# Altium PCB Tx_pcb.PcbDoc
Units mm, origin at the board's own origin, x right, y up, seen from the top; angles counter-clockwise.
Board outline 78 x 78 mm, 4 copper layers (Top Layer, MidLayer1, MidLayer2, Bottom Layer); 139 components, 86 nets, 410 pads, 146 vias.
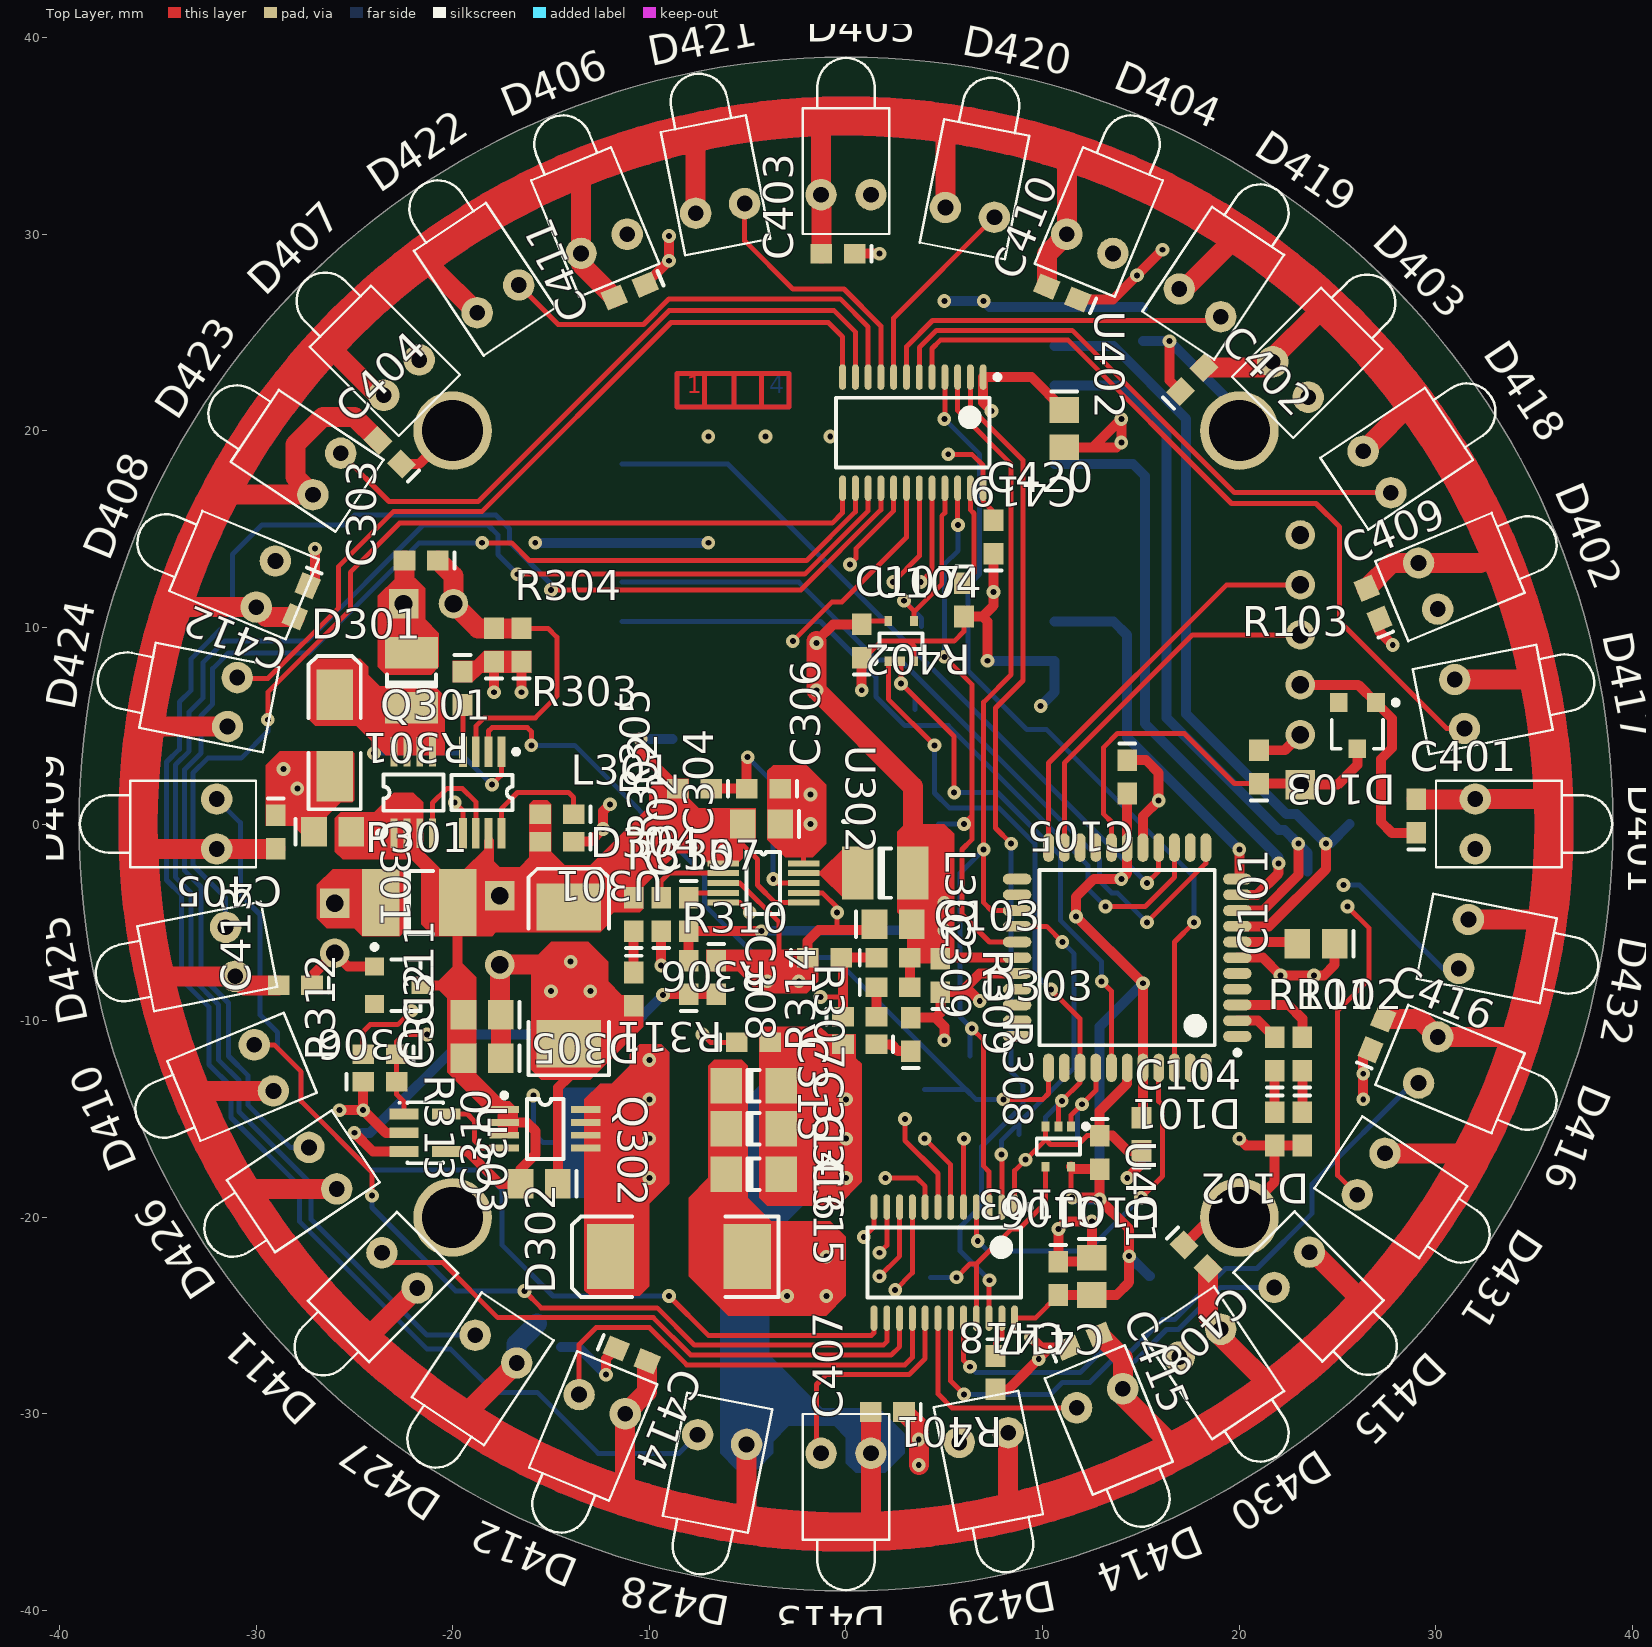
[diagram p0: Top Layer view]
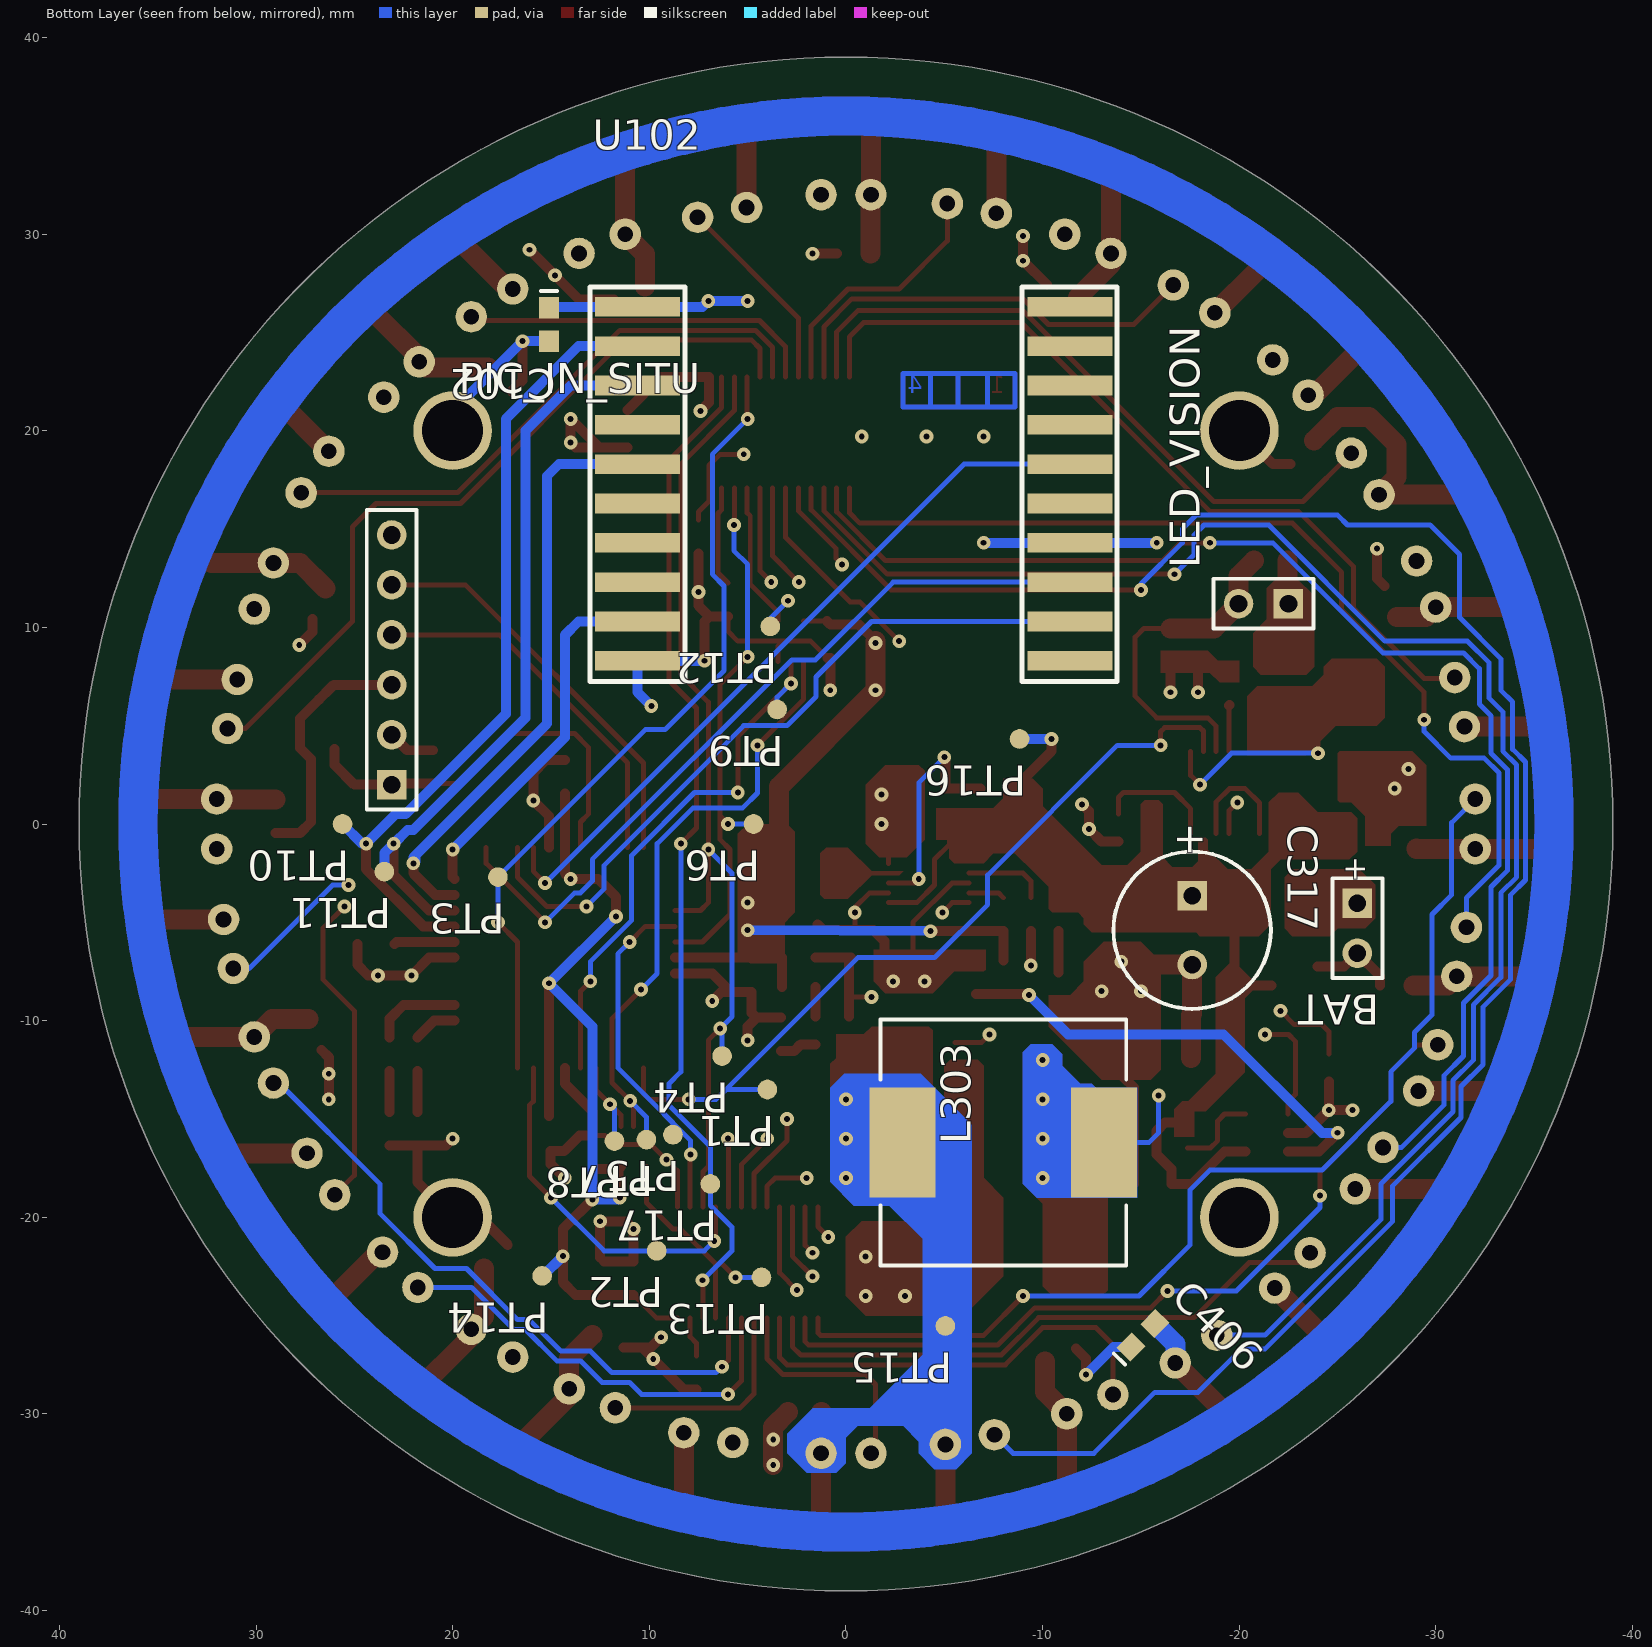
[diagram p1: Bottom Layer view, seen from below]
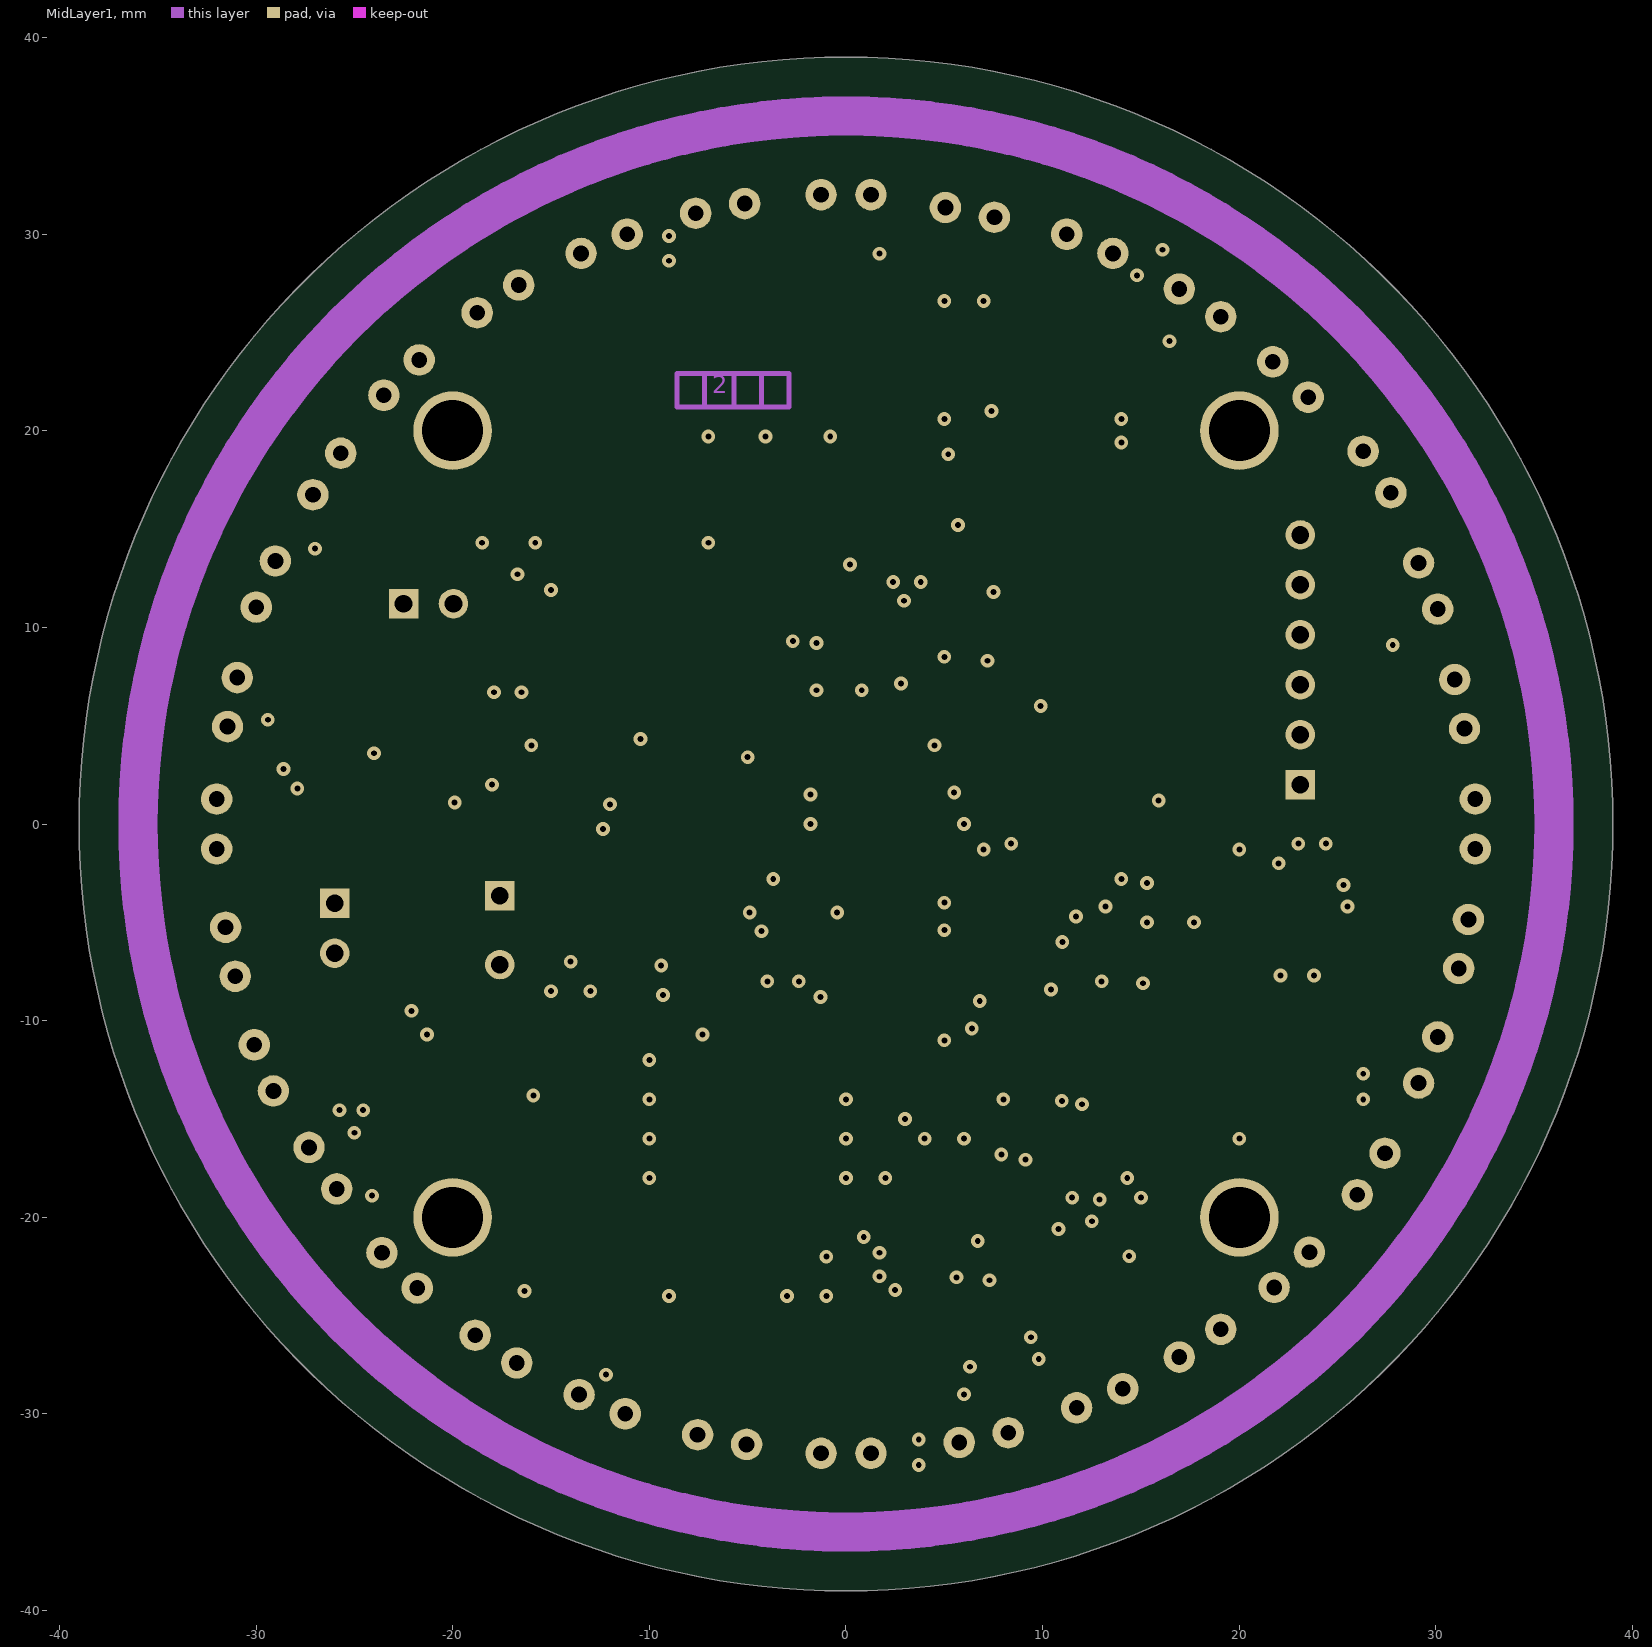
[diagram p2: MidLayer1]
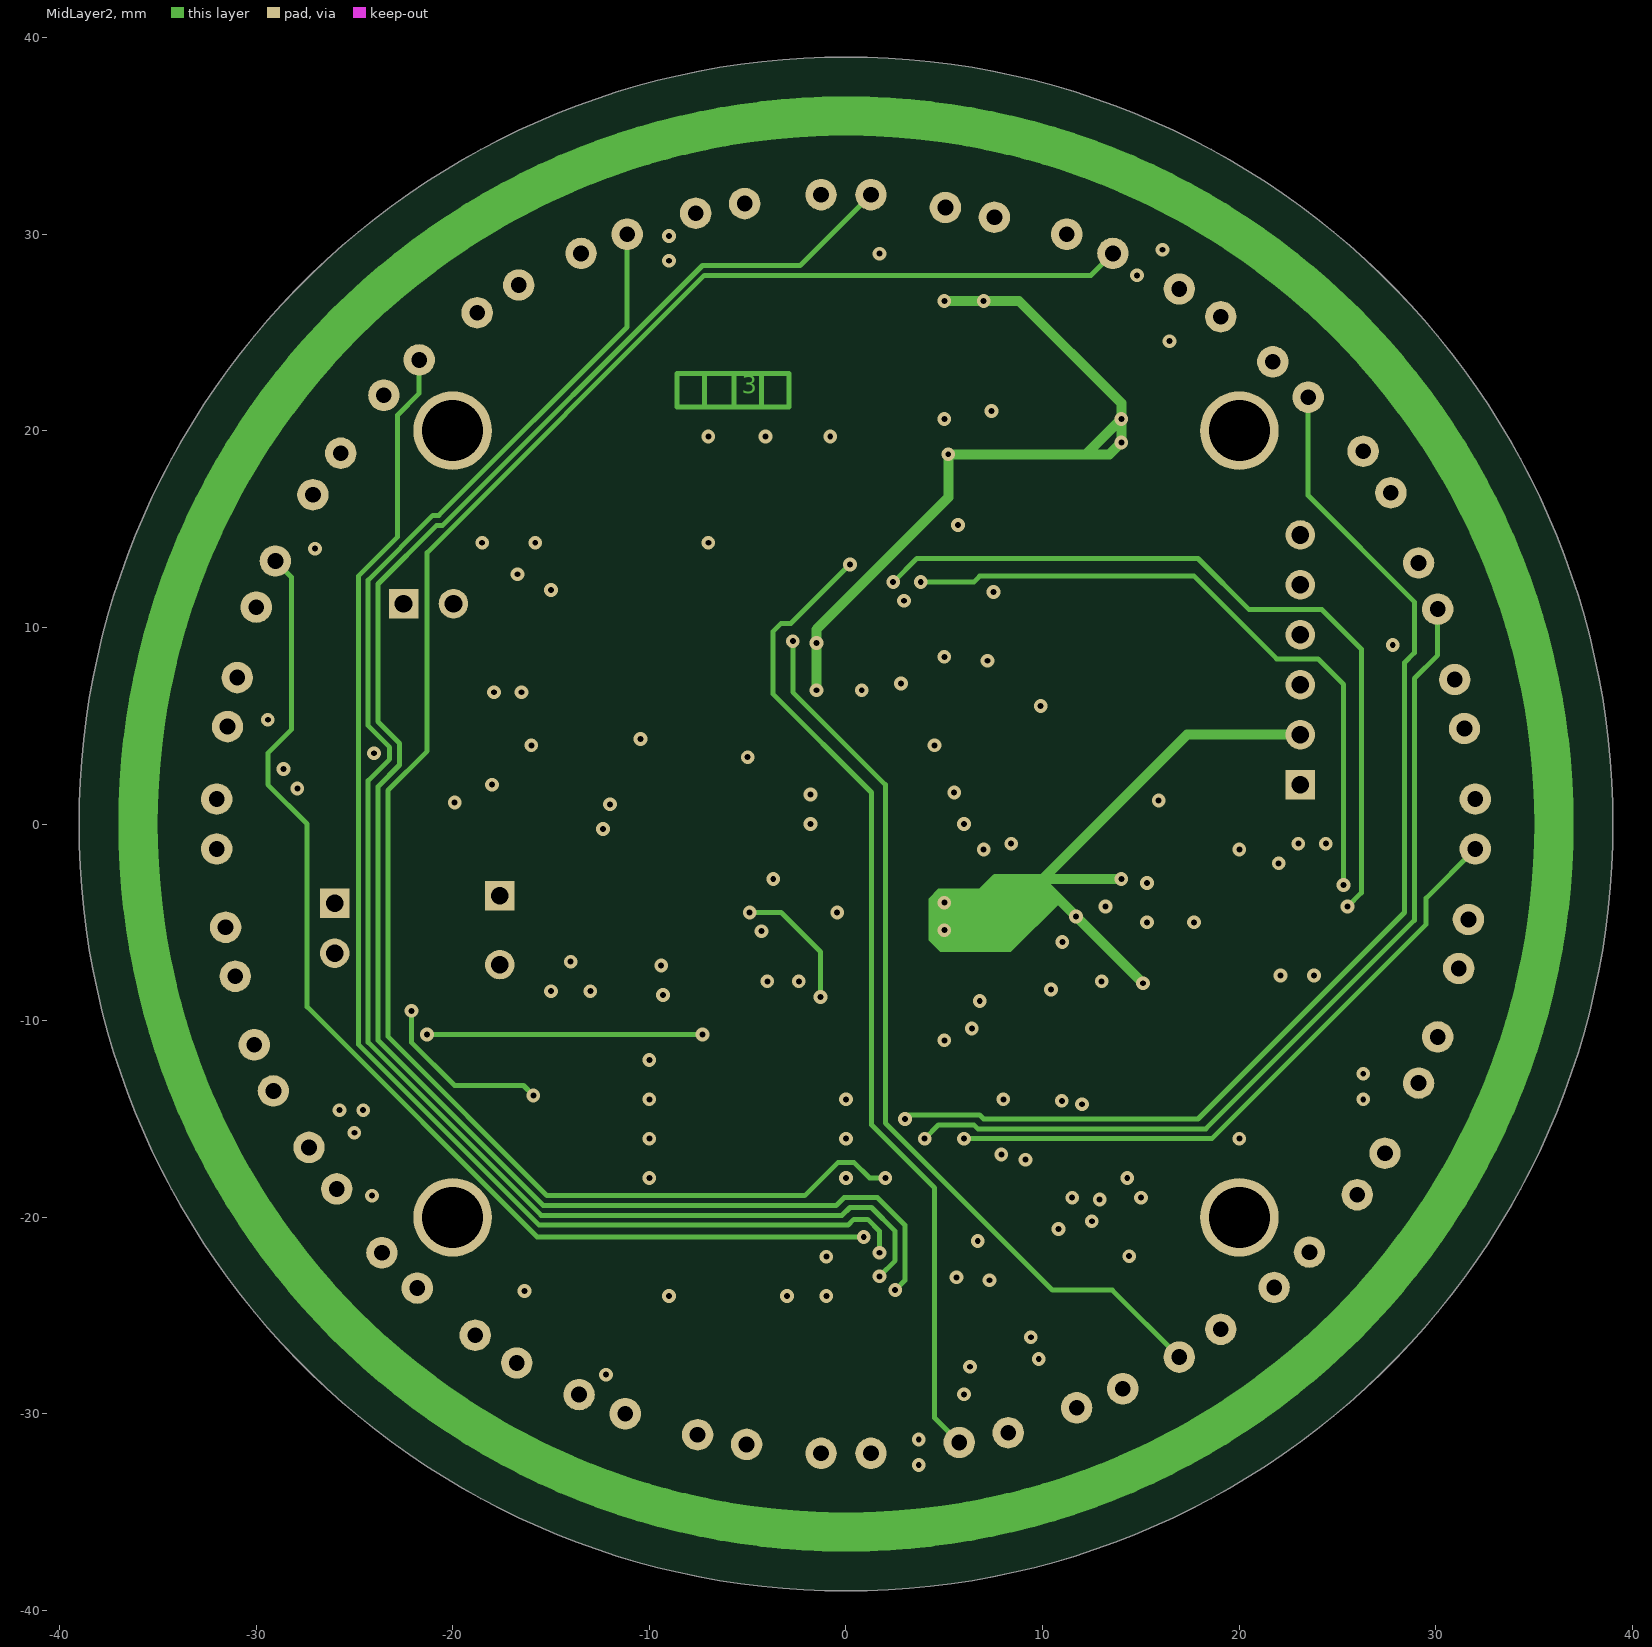
[diagram p3: MidLayer2]

## Layer stack, top to bottom
Top Layer: signal copper 0.0356
Dielectric: core 0.32, FR-4, Dk 4.8
MidLayer1: signal copper 0.0356
Dielectric: prepreg 0.32, FR-4, Dk 4.8
MidLayer2: signal copper 0.0356
Dielectric: core 0.32, FR-4, Dk 4.8
Bottom Layer: signal copper 0.0356

## Board outline
-39,0 ccw(c0,0) 0,-39 ccw(c0,0) 39,0 ccw(c0,0) 0,39 ccw(c0,0)

## Design rules (kind name [scope] priority, off if disabled: settings)
Clearance [All] p1: gap=0.15
ComponentClearance [All] p1: gap=0.15 collisioncheckmode=3 verticalgap=0.254 showdistances=FALSE
HoleSize [All] p1: absolutevalues=TRUE maxlimit=5 minlimit=0.3 maxpercent=80.000 minpercent=20.000
PolygonConnect [All] p1: connectstyle=Relief reliefconductorwidth=0.254 reliefentries=4 polygonreliefangle="90 Angle"
RoomDefinition Tx_leds [InComponentClass('Tx_leds')] p1: confinementstyle=ConfineIn formatcopy=TRUE lockcomponents=FALSE outline -39.1,-42 44,-42 44,39.1 -39.1,39.1
RoomDefinition Tx_micro [InComponentClass('Tx_micro')] p2: confinementstyle=ConfineIn formatcopy=TRUE lockcomponents=FALSE outline -39.1,-42 44,-42 44,42 -39.1,42
RoomDefinition Tx_power [InComponentClass('Tx_power')] p3: confinementstyle=ConfineIn formatcopy=TRUE lockcomponents=FALSE outline -39.1,-42 44,-42 44,42 -39.1,42
RoutingVias [All] p1: holewidth=0.711 width=1.27 viastyle="Through Hole" minholewidth=0.3 minwidth=0.7 maxholewidth=0.711 maxwidth=1.27
SolderMaskExpansion [All] p1: expansion=0.102
TestPointUsage [All] p1: valid=0 allowmultiple=FALSE
Testpoint [All] p1: side=15 testpointundercomponent=TRUE minsize=1.016 maxsize=2.54 preferedsize=1.524 minholesize=0 maxholesize=1.016 preferedholesize=0.813 testpointgrid=0.025 style=1023 order=0123456789
Width [All] p1: maxlimit=3 minlimit=0.127 preferedwidth=0.254
17 further rules are at their usual default settings.

## Classes and differential pairs
component class Tx_leds: C401 C402 C403 C404 C405 C406 C407 C408 C409 C410 C411 C412 C413 C414 C415 C416 C417 C418 C419 C420 D401 D402 D403 D404 D405 D406 D407 D408 D409 D410 D411 D412 D413 D414 D415 D416 D417 D418 D419 D420 D421 D422 D423 D424 D425 D426 D427 D428 D429 D430 D431 D432 PT17 R401 R402 U401 U402
component class Tx_micro: C101 C102 C103 C104 C105 C106 C107 D101 D102 D103 PIC_IN_SITU PT1 PT2 PT3 PT4 PT5 PT6 PT7 PT8 PT9 PT10 PT11 PT12 PT13 R101 R102 R103 U101 U102 U103 U104
component class Tx_power: BAT C301 C302 C303 C304 C306 C307 C308 C309 C310 C311 C312 C313 C314 C315 C316 C317 D301 D302 D303 D304 D305 D306 L301 L302 L303 LED_VISION P301 PT14 PT15 PT16 Q301 Q302 R301 R302 R303 R304 R305 R306 R307 R308 R309 R310 R311 R312 R313 R314 R315 U301 U302 U303

## Components (designator, comment, footprint, x,y, rotation, side; value= is the part's Value field where it differs from the comment)
BAT "Battery" BAT-2 -26,-5.3 r270 bottom
C101 "10u cap 0805 X7R 10V" 0805 23.9,-6.1 r180 top
C102 "100n cap 0603 X7R 25V" 0603 15.1,25.4 r270 bottom
C103 "100n cap 0603 X7R 25V" 0603 4.8,-7.7 r90 top
C104 "100n cap 0603 X7R 25V" 0603 15.022,-15.778 r90 top
C105 "100n cap 0603 X7R 25V" 0603 14.3,2.4 r270 top
C106 "100n cap 0603 X7R 25V" 0603 12.9,-16.7 r270 top
C107 "100n cap 0603 X7R 25V" 0603 0.8,9.3 r90 top
C301 "10u cap 0805 X7R 10V" 0805 -26.1,-0.4 r0 top
C302 "100n cap 0603 X7R 25V" 0603 -14.7,-0.9 r180 top
C303 "1u cap 0603 X7R 25V" 0603 -21.6,13.4 r180 top
C304 "10u cap 0805 X7R 10V" 0805 -4.3,0 r180 top
C306 "100p cap 0603 cog 25V" 0603 -4.2,1.8 r180 top
C307 "100n cap 0603 X7R 25V" 0603 -9.4,-4.6 r90 top
C308 "10p cap 0603 cog 25V" 0603 2.4,-6.8 r0 top
C309 "10u cap 0805 X7R 10V" 0805 2.4,-5.1 r0 top
C310 "Cap" 0805 -15.6,-18.3 r180 top
C311 "Cap" 0805 -18.5,-9.7 r180 top
C312 "Cap" 0805 -18.5,-11.9 r180 top
C313 "Cap" 0603 -4.7,-11.1 r0 top
C314 "Cap" 1206 -4.7,-13.3 r0 top
C315 "Cap" 1206 -4.7,-17.8 r0 top
C316 "Cap" 1206 -4.7,-15.5 r0 top
C317 "94SA107X0016EBP" E -17.6,-5.4 r270 bottom
C401 "100n cap 0603 X7R 25V" 0603 29,0.4 r90 top
C402 "100n cap 0603 X7R 25V" 0603 17.6,22.6 r45 top
C403 "100n cap 0603 X7R 25V" 0603 -0.4,29 r180 top
C404 "100n cap 0603 X7R 25V" 0603 -23.2,18.9 r135 top
C405 "100n cap 0603 X7R 25V" 0603 -29,-0.4 r270 top
C406 "100n cap 0603 X7R 25V" 0603 -15.1,-26 r135 bottom
C407 "100n cap 0603 X7R 25V" 0603 2.1,-29.9 r180 top
C408 "100n cap 0603 X7R 25V" 0603 17.8,-22 r315 top
C409 "100n cap 0603 X7R 25V" 0603 26.8,11.2 r112.5 top
C410 "100n cap 0603 X7R 25V" 0603 11,27 r157.5 top
C411 "100n cap 0603 X7R 25V" 0603 -11,27.1 r202.5 top
C412 "100n cap 0603 X7R 25V" 0603 -27.7,11.32 r247.5 top
C413 "100n cap 0603 X7R 25V" 0603 -28,-8.2 r180 top
C414 "100n cap 0603 X7R 25V" 0603 -10.9,-27 r337.5 top
C415 "100n cap 0603 X7R 25V" 0603 12.1,-26.3 r22.5 top
C416 "100n cap 0603 X7R 25V" 0603 27,-10.7 r67.5 top
C417 "10u cap 0805 X7R 10V" 0805 12.5,-23 r270 top
C418 "100n cap 0603 X7R 25V" 0603 10.8,-23.1 r270 top
C419 "10u cap 0805 X7R 10V" 0805 11.1,20.1 r270 top
C420 "100n cap 0603 X7R 25V" 0603 7.5,14.6 r90 top
D101 "LED0" 0603 21.8,-15.5 r270 top
D102 "LED0" 0603 23.2,-15.5 r270 top
D103 "BZX84C5V6LT1" 318-07 26,5 r180 top
D301 "10MQ040" D-64 -26,4.5 r90 top
D302 "30BQ040" SMC -8.5,-22 r180 top
D303 "LED3" 0603 3.3,-10.7 r90 top
D304 "30BQ040" SMC -14.1,-7.7 r90 top
D305 "LED2" 0603 -10.8,-8.4 r270 top
D306 "BZX84C5V6LT1" 318-07 -22.8,-8.2 r270 top
D401 "TSAL5300" LED-1 32,0 r0 top
D402 "TSAL5300" LED-1 29.6,12.1 r22.5 top
D403 "TSAL5300" LED-1 22.601,22.601 r45 top
D404 "TSAL5300" LED-1 12.4,29.5 r67.5 top
D405 "TSAL5300" LED-1 0,32 r90 top
D406 "TSAL5300" LED-1 -12.3,29.5 r112.5 top
D407 "TSAL5300" LED-1 -22.6,22.7 r135 top
D408 "TSAL5300" LED-1 -29.5,12.2 r157.5 top
D409 "TSAL5300" LED-1 -32,0 r180 top
D410 "TSAL5300" LED-1 -29.6,-12.4 r202.5 top
D411 "TSAL5300" LED-1 -22.698,-22.698 r225 top
D412 "TSAL5300" LED-1 -12.4,-29.5 r247.5 top
D413 "TSAL5300" LED-1 0,-32 r270 top
D414 "TSAL5300" LED-1 12.9,-29.2 r292.5 top
D415 "TSAL5300" LED-1 22.668,-22.668 r315 top
D416 "TSAL5300" LED-1 29.6,-12 r337.5 top
D417 "TSAL5300" LED-1 31.2,6.1 r11.25 top
D418 "TSAL5300" LED-1 27,17.9 r33.75 top
D419 "TSAL5300" LED-1 18,26.5 r56.25 top
D420 "TSAL5300" LED-1 6.3,31.1 r78.75 top
D421 "TSAL5300" LED-1 -6.4,31.3 r101.25 top
D422 "TSAL5300" LED-1 -17.7,26.7 r123.75 top
D423 "TSAL5300" LED-1 -26.4,17.8 r146.25 top
D424 "TSAL5300" LED-1 -31.2,6.2 r168.75 top
D425 "TSAL5300" LED-1 -31.3,-6.5 r191.25 top
D426 "TSAL5300" LED-1 -26.6,-17.5 r213.75 top
D427 "TSAL5300" LED-1 -17.8,-26.7 r236.25 top
D428 "TSAL5300" LED-1 -6.3,-31.3 r258.75 top
D429 "TSAL5300" LED-1 7,-31.2 r281.25 top
D430 "TSAL5300" LED-1 18,-26.4 r303.75 top
D431 "TSAL5300" LED-1 26.7,-17.8 r326.25 top
D432 "TSAL5300" LED-1 31.4,-6.1 r348.75 top
L301 "B82422H1223K" 1210 -22.1,7.3 r90 top
L302 "B82422H1223K" 1210 2,-2.5 r0 top
L303 "B82477P4103M000" B82477P4103M000 -8,-16.2 r0 bottom
LED_VISION "Header 2" HDR1X2 -22.5,11.2 r0 bottom
P301 "Polyswitch MINISMDC110F/24" 1812 -21.7,-4 r0 top
PIC_IN_SITU "Header 6" HDR1X6 23.1,2 r90 bottom
PT1 "Plug" TP 4,-13.5 r270 bottom
PT2 "Plug" TP 9.625,-21.7 r270 bottom
PT3 "Plug" TP 17.7,-2.7 r270 bottom
PT4 "Plug" TP 6.3,-11.8 r270 bottom
PT5 "Plug" TP 8.8,-15.8 r270 bottom
PT6 "Plug" TP 4.7,0 r270 bottom
PT7 "Plug" TP 10.15,-16.05 r270 bottom
PT8 "Plug" TP 11.775,-16.125 r270 bottom
PT9 "Plug" TP 3.5,5.825 r270 bottom
PT10 "Plug" TP 25.6,0 r270 bottom
PT11 "Plug" TP 23.475,-2.425 r270 bottom
PT12 "Plug" TP 3.85,10.05 r270 bottom
PT13 "Plug" TP 4.3,-23.05 r270 bottom
PT14 "Plug" TP 15.45,-22.975 r270 bottom
PT15 "Plug" TP -5.05,-25.525 r270 bottom
PT16 "Plug" TP -8.825,4.325 r270 bottom
PT17 "Plug" TP 6.9,-18.3 r270 bottom
Q301 "IRF7604" Micro8 -22,1.6 r0 top
Q302 "IRF7604" Micro8 -15.3,-15.5 r270 top
R101 "Res 680 100mW" 0603 21.8,-11.7 r90 top
R102 "Res 680 100mW" 0603 23.2,-11.7 r90 top
R103 "Res 10k 100mW" 0603 21,2.9 r90 top
R301 "Res 6.8k 100mW" 0603 -19.5,6.9 r270 top
R302 "Res 4.7k 100mW" 0603 -14.7,0.5 r180 top
R303 "Res 10 100mW" 0603 -17.9,9.1 r90 top
R304 "Res 22 100mW" 0603 -16.5,9.1 r90 top
R305 "Res 560k 100mW" 0603 -7.7,1.8 r180 top
R306 "Res 680k 100mW" 0603 -8,-4.6 r270 top
R307 "Res 75k 100mW" 0603 0.7,-9.8 r0 top
R308 "Res 560k 100mW" 0603 2.4,-8.3 r0 top
R309 "Res 100k 100mW" 0603 -1.1,-6.8 r0 top
R310 "Res2" 0603 -8,-7.8 r90 top
R311 "Res2" 0603 -6.6,-7.8 r270 top
R312 "Res2" 0603 -23.7,-11.7 r180 top
R313 "Res2" 0603 -23.7,-13.1 r0 top
R314 "Res2" 0603 0.7,-11.2 r180 top
R315 "Res 680 100mW" 0603 -10.8,-4.6 r90 top
R401 "Res 3k 100mW" 0603 7.6,-27.9 r270 top
R402 "Res 3k 100mW" 0603 6,11.4 r270 top
U101 "PIC24HJ128GP504-E/PT" TQFP-PT44_L 14.3,-6.8 r180 top
U102 "XBee" XBee_SM 10.6,26.3 r180 bottom
U103 "MC74VHC1G32DFT1" 419A-01_L 10.8,-16.4 r270 top
U104 "MC74VHC1G32DFT1" 419A-01_L 2.8,9.3 r90 top
U301 "LM3401" MSOP8 -18.5,1.6 r180 top
U302 "TPS62000" MS10 -4.2,-3 r270 top
U303 "LM3475" SOT23-5 -21.4,-15.7 r270 top
U401 "CAT4016" TSSOP65P640X120-24L 5,-22.3 r270 top
U402 "CAT4016" TSSOP65P640X120-24L 3.4,19.9 r270 top

## Footprints (in the part's own frame and the unit in brackets; to place one, negate y for a bottom-side part, rotate by r counter-clockwise, add the part's x,y. Pads: shape width x height; smd on the part's side, far side on the other; paste and mask are expansions set on the pad)
318-07 [mm] "SOT-23; 3 Leads; Body 3.0 x 2.5 mm, inc. leads (LxW max)"
  rect 0.9x0.95 smd: 1(-0.95,-1.175) 2(0.95,-1.175) 3(0,1.175)
  silkscreen extent -2.07,-1.3 1.3,1.18
419A-01_L [mm] "SOT353, 5-Leads, Body 2x1.3mm, Pitch 0.65mm, Lead Span 2.1mm, IPC High Density"
  rect 0.5x0.4 smd: 1(-1.025,0.65) 2(-1.025,0) 3(-1.025,-0.65) 4(1.025,-0.65) 5(1.025,0.65)
  silkscreen extent -1.15,-1.1 0.4,1.53, body extent -0.7,-1.1 0.7,1.1, height 1.1
0603 [mm] "Chip Capacitor; Body 1.6 x 0.8 mm (LxW typ)"
  rect 1.1x1 smd: 1(-0.85,0) 2(0.85,0)
  silkscreen extent -1.7,-0.4 -1.7,0.4
0805 [mm] "Chip Capacitor; Body 2.0 x 1.2 mm (LxW typ)"
  rect 1.3x1.5 smd: 1(-0.95,0) 2(0.95,0)
  silkscreen extent -1.9,-0.65 -1.9,0.65
1206 [mm] "Chip Capacitor; Body 3.2 x 1.6 mm (LxW typ)"
  rect 1.6x1.8 smd: 1(-1.4,0) 2(1.4,0)
  silkscreen extent -0.3,-0.8 0.3,0.8
1210 [mm] "Chip Capacitor; Body 3.2 x 2.5 mm (LxW typ)"
  rect 1.6x2.7 smd: 1(-1.4,0) 2(1.4,0)
  silkscreen extent -0.3,-1.25 0.3,1.25
1812 [mm] "Chip Capacitor; Body 4.5 x 3.2 mm (LxW typ)"
  rect 1.9x3.4 smd: 1(-1.95,0) 2(1.95,0)
  silkscreen extent -0.7,-1.6 0.7,1.6
B82477P4103M000 [mm] "B82477P4103M000 Inductor, 2-Leads, Body 12,4x12,4mm, IPC Medium Density"
  rect 3.35x5.6 smd: 1(-5.125,0) 2(5.125,0)
  silkscreen extent -6.25,-6.25 6.25,6.25, body extent -6.25,-6.25 6.25,6.25, height 8.5
BAT-2 [mm] "Multicell Battery; 2 Leads"
  rect 1.5x1.5 hole 0.9: 1(-1.27,0)
  round 1.5 hole 0.9: 2(1.27,0)
  silkscreen extent -2.54,-1.27 2.54,1.27
D-64 [mm] "DO-214-AC/SMA; 2 C-Bend Leads; Body 5.3 x 2.6 mm, inc. leads (LxW)"
  rect 2.55x1.85 smd: 1(-2.075,0) 2(2.075,0)
  silkscreen extent -3.75,-1.33 4.05,1.33
E [mm] "Capacitor, Electrolytic, Radial; Body 8 x 10.5 mm (Dia.xH typ); Pin Spacing 3.5 mm (typ)"
  rect 1.5x1.5 hole 0.9: 1(-1.75,0)
  round 1.5 hole 0.9: 2(1.75,0)
  silkscreen extent -4,-4 4,4
HDR1X2 [mm] "Connector; Header; 2 Position"
  rect 1.5x1.5 hole 0.9: 1(0,0)
  round 1.5 hole 0.9: 2(2.54,0)
  silkscreen extent -1.27,-1.27 3.81,1.27
HDR1X6 [mm] "Connector; Header; 6 Position"
  rect 1.5x1.5 hole 0.9: 1(0,0)
  round 1.5 hole 0.9: 2(2.54,0) 3(5.08,0) 4(7.62,0) 5(10.16,0) 6(12.7,0)
  silkscreen extent -1.27,-1.27 13.97,1.27
LED-1 [mm] "Typical RED GaAs LED; 2 Leads"
  round 1.6 hole 0.8: 1(0,1.27) 2(0,-1.27)
  silkscreen extent -2,-2.2 6.95,2.2
Micro8 [mm] "Shrink Small Outline; 8 Leads; Body Width 3 mm; Pitch 0.65 mm"
  rect 0.35x1.5 smd: 1(-0.975,-2.075) 2(-0.325,-2.075) 3(0.325,-2.075) 4(0.975,-2.075) 5(0.975,2.075) 6(0.325,2.075) 7(-0.325,2.075) 8(-0.975,2.075)
  silkscreen extent -1.82,-2.2 1.52,0.92
MS10 [mm] "Shrink Small Outline; 10 Leads; Body Width 3 mm; Pitch 0.5 mm"
  rect 0.3x1.6 smd: 1(-1,-2.05) 2(-0.5,-2.05) 3(0,-2.05) 4(0.5,-2.05) 5(1,-2.05) 6(1,2.05) 7(0.5,2.05) 8(0,2.05) 9(-0.5,2.05) 10(-1,2.05)
  silkscreen extent -1.82,-2.17 1.58,0.85
MSOP8 [mm] "Shrink Small Outline; 8 Leads; Body Width 3 mm; Pitch 0.65 mm"
  rect 0.4x1.55 smd: 1(-0.975,-2.075) 2(-0.325,-2.075) 3(0.325,-2.075) 4(0.975,-2.075) 5(0.975,2.075) 6(0.325,2.075) 7(-0.325,2.075) 8(-0.975,2.075)
  silkscreen extent -1.85,-2.2 1.55,0.9
SMC [mm] "DO-214-AB/SMC; 2 C-Bend Leads; Body 7.9 x 5.9 mm, inc. leads (LxW)"
  rect 2.4x3.3 smd: 1(-3.475,0) 2(3.475,0)
  silkscreen extent -5.07,-2.05 5.43,2.05
SOT23-5 [mm] "SOT-23/SC-74A; 5 Leads; Body 3 x 3 mm, inc. leads (LxW max)"
  rect 0.55x1.45 smd: 1(-0.95,-1.075) 2(0,-1.075) 3(0.95,-1.075) 4(0.95,1.075) 5(-0.95,1.075)
  silkscreen extent -1.57,-1.35 1.55,0.9
TP [mm] "Test point"
  round 1 smd: 1(0,0)
TQFP-PT44_L [mm] "Thin QFP, 44-Leads, Body 10x10mm, Pitch 0.8mm, IPC High Density"
  oval 1.45x0.55 smd: 1(-5.6,4) 2(-5.6,3.2) 3(-5.6,2.4) 4(-5.6,1.6) 5(-5.6,0.8) 6(-5.6,0) 7(-5.6,-0.8) 8(-5.6,-1.6) 9(-5.6,-2.4) 10(-5.6,-3.2) 11(-5.6,-4) 23(5.6,-4) 24(5.6,-3.2) 25(5.6,-2.4) 26(5.6,-1.6) 27(5.6,-0.8) 28(5.6,0) 29(5.6,0.8) 30(5.6,1.6) 31(5.6,2.4) 32(5.6,3.2) 33(5.6,4)
  oval 0.55x1.45 smd: 12(-4,-5.6) 13(-3.2,-5.6) 14(-2.4,-5.6) 15(-1.6,-5.6) 16(-0.8,-5.6) 17(0,-5.6) 18(0.8,-5.6) 19(1.6,-5.6) 20(2.4,-5.6) 21(3.2,-5.6) 22(4,-5.6) 34(4,5.6) 35(3.2,5.6) 36(2.4,5.6) 37(1.6,5.6) 38(0.8,5.6) 39(0,5.6) 40(-0.8,5.6) 41(-1.6,5.6) 42(-2.4,5.6) 43(-3.2,5.6) 44(-4,5.6)
  silkscreen extent -5.72,-4.45 4.45,4.95, body extent -5,-5 5,5, height 1.2
TSSOP65P640X120-24L [mm] "TSSOP, 24-Leads, Body 7,8x4,4mm (max), Pitch 0,65mm, IPC High Density"
  oval 1.3x0.35 smd: 1(-2.825,3.575) 2(-2.825,2.925) 3(-2.825,2.275) 4(-2.825,1.625) 5(-2.825,0.975) 6(-2.825,0.325) 7(-2.825,-0.325) 8(-2.825,-0.975) 9(-2.825,-1.625) 10(-2.825,-2.275) 11(-2.825,-2.925) 12(-2.825,-3.575) 13(2.825,-3.575) 14(2.825,-2.925) 15(2.825,-2.275) 16(2.825,-1.625) 17(2.825,-0.975) 18(2.825,-0.325) 19(2.825,0.325) 20(2.825,0.975) 21(2.825,1.625) 22(2.825,2.275) 23(2.825,2.925) 24(2.825,3.575)
  silkscreen extent -2.95,-3.9 1.78,4.43, body extent -2.2,-3.9 2.2,3.9, height 1.2
XBee_SM [mm]
  rect 4.32x1 smd: 1(0,0) 2(0,-2) 3(0,-4) 4(0,-6) 5(0,-8) 6(0,-10) 7(0,-12) 8(0,-14) 9(0,-16) 10(0,-18) 11(22,-18) 12(22,-16) 13(22,-14) 14(22,-12) 15(22,-10) 16(22,-8) 17(22,-6) 18(22,-4) 19(22,-2) 20(22,0)
  silkscreen extent -2.41,-19.05 24.38,1.02

## Part data
BAT: "Multicell Battery"
C101 C102 C103 C104 C105 C106 C107 C301 C302 C303 C304 C306 C307 C308 C309 C401 C402 C403 C404 C405 C406 C407 C408 C409 C410 C411 C412 C413 C414 C415 C416 C417 C418 C419 C420: library part Cap, "Capacitor"
C310 C311 C312 C313 C314 C315 C316: "Capacitor"
C317: "Solid Aluminum Capacitor with Organic Semiconductor Electrolyte: 100uF, 16V, Bulk Pack"
D101 D102: "Typical INFRARED GaAs LED"
D103 D306: "Zener Voltage Regulator Diode"
D301 D302 D304: "Schottky Rectifier"
D303: "Typical BLUE SiC LED"
D305: "Typical RED, GREEN, YELLOW, AMBER GaAs LED"
D401 D402 D403 D404 D405 D406 D407 D408 D409 D410 D411 D412 D413 D414 D415 D416 D417 D418 D419 D420 D421 D422 D423 D424 D425 D426 D427 D428 D429 D430 D431 D432: library part LED1, "Typical RED GaAs LED"
L301 L302 L303: library part Inductor, "Inductor"
LED_VISION: "Header, 2-Pin"
P301: library part "Res Varistor", "Varistor (Voltage-Sensitive Resistor)"
PIC_IN_SITU: "Header, 6-Pin"
Q301 Q302: "HEXFET Power MOSFET"
R101 R102 R103 R301 R302 R303 R304 R305 R306 R307 R308 R309 R315 R401 R402: library part Res2, "Resistor"
R310 R311 R312 R313 R314: "Resistor"
U101: "High Speed General Purpose 16-Bit Flash Microcontroller, 128KB Flash, 8KB RAM, 44-Pin TQFP, Extended Temperature"
U102: "OEM RF Modules"
U103 U104: "2-Input OR Gate"
U301: "Hysteretic PFET Controller for High Power LED Drive"
U302: library part TPS6200x, "HIGH-EFFICIENCY STEP-DOWN LOW POWER DC-DC CONVERTER"
U303: "Hysteretic PFET Buck Controller"
U401 U402: "16-Channel Constant Current LED Driver"

## Free pads (board coordinates)
  round 4 hole 3.1: 0(-20,20) 1(-20,-20) 2(20,20) 3(20,-20)

## Via types
v1: diameter 0.7, hole 0.3, Top Layer to Bottom Layer, 146 vias

## Nets (pads, with @x,y where several pads share a name; then routed paths per layer and width w, separated by ;. In a path a pad name is that pad's centre, name@x,y a point inside that pad or via, vN(x,y) a via of type N, cw(c..) or ccw(c..) an arc to the next point about the centre after c; other vN are vias at no path point)
+3.3V: C102.1 C103.2 C104.2 C105.2 C106.2 C107.2 C308.2 C309.2 C417.2 C418.2 C419.2 C420.2 L302.2 PIC_IN_SITU.2 PT14.1 R103.2 R306.2 R308.2 R310.2 U101.17 U101.28 U101.40 U102.1 U103.5 U104.5 U401.24 U402.24 | length 202.2
  Top Layer w0.254: C107.2@0.975,10.325 U104.5 ; C308.2@3.3,-6.85 C308.2 C308.2@3.35,-6.7 ; C103.2 C103.2@4.85,-6.8 ; v1(5.2,18.8) 6.4,18.8 6.975,18.225 U402.24 6.975,16.4 7.5,15.875 C420.2 ; U401.24 9.625,-25.125 C418.2 ; U103.5 11.45,-18.95 v1(11.5,-19) ; C104.2 C104.2@15.1,-14.849
  Top Layer w0.508: R310.2 R306.2 v1(-4.3,-5.45) ; v1@-1.5,9.3 -0.65,10.15 C107.2 C107.2@0.975,10.325 ; R308.2 C308.2 ; C308.2@3.3,-6.85 C103.2 ; C308.2@3.35,-6.7 C309.2 ; C103.2@4.85,-6.8 U101.28 ; C418.2 C417.2 13.75,-23.95 14.4,-23.3 14.4,-20.6 12.8,-19 v1(11.5,-19) ; U103.5 11.575,-17.55 C106.2 v1(12.9,-19.1) ; C105.2 U101.17 14.3,-2.5 v1(14,-2.8) 12.6,-2.8 11.7,-3.7 v1(11.7,-4.7) v1(15.1,-8.1) U101.40 C104.2@15.1,-14.849 ; R103.2 22.31,3.75 PIC_IN_SITU.2 ; C419.2 13.75,19.15 v1(14,19.4) v1(14,20.6) 12.55,19.15 C419.2
  Top Layer w1.016: v1@-1.5,9.3 v1(-1.5,6.8) 3.4,1.9 L302.2
  MidLayer2 w0.508: v1(-1.5,6.8) -1.5,9.9 5.2,16.6 v1(5.2,18.8) 12.2,18.8 ; v1(5,-5.4) 7.6,-2.8 v1(14,-2.8) ; v1(5,-4) 8.8,-4 17.34,4.54 PIC_IN_SITU.2 ; v1(5,26.6) 8.8,26.6 14,21.4 v1(14,19.4) 13.4,18.8 12.2,18.8 ; 9.8,-2.8 v1(15.1,-8.1) ; v1(14,20.6) 12.2,18.8
  Bottom Layer w0.508: v1(-4.3,-5.45) v1(5,-5.4) ; v1(5,26.6) v1(7,26.6) 7.3,26.3 U102.1 15.05,26.3 C102.1 ; v1(11.5,-19) 11.6,-19.1 v1(12.9,-19.1) 12.9,-10.3 v1(15.1,-8.1) v1(11.7,-4.7) ; v1(14.4,-21.975) 15.4,-22.975 PT14.1
  other v1: -1.5,9.2
DRV1_BLANK: PT13.1 U103.4 U401.21 | length 12
  Top Layer w0.254: v1(5.625,-23.05) 6.3,-22.375 6.625,-22.375 ; U401.21 6.625,-22.375 ; U103.4 10.15,-19.25 8.8,-20.6 8.4,-20.6 6.625,-22.375
  Bottom Layer w0.254: PT13.1 v1(5.625,-23.05)
DRV1_LATCH: PT2.1 U101.41 U401.4 | length 18.5
  Top Layer w0.254: U401.4 6.625,-21.125 v1(6.7,-21.2) ; v1(15,-19) 16.1,-17.9 16.1,-14.3 15.9,-14.1 U101.41
  Bottom Layer w0.254: v1(6.7,-21.2) 7.2,-21.7 12.3,-21.7 v1(15,-19)
DRV1_TO_DRV2: PT17.1 U401.22 U402.2 | length 52.1
  Top Layer w0.254: U402.2 6.325,21.175 9,18.5 9,7.3 7.6,5.9 7.6,-0.2 v1(8.4,-1) ; U401.22 7.275,-23.225 v1(7.3,-23.2)
  Bottom Layer w0.254: v1(7.3,-23.2) 5.8,-21.7 5.8,-20.5 6.9,-19.4 6.9,-16.4 9,-14.3 9,-13.2 8.4,-12.6 v1(8.4,-1)
DRV2_BLANK: PT12.1 U104.4 U402.21 | length 9.9
  Top Layer w0.254: v1(2.95,11.35) 3.45,10.85 3.45,10.775 ; U104.4 3.45,10.775 ; U402.21 5.025,15.825 4.869,15.669 4.869,12.194 3.45,10.775
  Bottom Layer w0.254: v1(2.95,11.35) 3.85,10.45 PT12.1
DRV2_LATCH: PT3.1 U101.42 U402.4 | length 41.9
  Top Layer w0.254: v1(5,20.6) 5.025,20.625 U402.4 ; U101.42 16.7,-6 v1(17.7,-5)
  Bottom Layer w0.254: v1(5,20.6) 6.8,18.8 6.8,12.7 6.2,12.1 6.2,7.8 9.2,4.8 10.2,4.8 PT3.1 v1(17.7,-5)
DRV2_TO_PIC: PT6.1 U101.27 U402.22 | length 28
  Top Layer w0.25: v1(5,8.5) 6.4,7.1
  Top Layer w0.254: v1@5.675,15.225 U402.22 ; v1(6,0) 6.355,0.355 6.4,0.355 ; 6.4,7.1 6.4,0.355 ; U101.27 7.3,-6 5.9,-4.6 5.9,-1.3 6.4,-0.8 6.4,0.355
  Top Layer w0.508: v1@5.675,15.225 v1(5.7,15.2)
  Bottom Layer w0.254: PT6.1 v1(6,0) ; v1(5,8.5) 5,13.2 5.7,13.9 v1(5.7,15.2)
DRV3_LATCH: U101.43
DRV4_LATCH: U101.44
GND: BAT.2 C101.1 C102.2 C103.1 C104.1 C105.1 C106.1 C107.1 C301.1 C302.1 C304.1 C306.1 C307.1 C309.1 C310.1 C311.1 C312.1 C314.1 C315.1 C316.1 C317.2 C401.1 C402.1 C403.1 C404.1 C405.1 C406.1 C407.1 C408.1 C409.1 C410.1 C411.1 C412.1 C413.1 C414.1 C415.1 C416.1 C417.1 C418.1 C419.1 C420.1 D101.2 D102.2 D103.1 D301.1 D302.1 D303.2 D304.1 D305.2 D306.1 pad.0 pad.1 pad.2 pad.3 PIC_IN_SITU.3 R301.1 R303.1 R304.1 R309.1 R311.1 R313.1 R401.2 R402.2 U101.6 U101.16 U101.29 U101.39 U102.10 U102.14 U103.3 U104.3 U301.5 U302.3 U302.7 U302.10 U303.2 U401.1 U402.1 | length 661.7
  Top Layer w0.254: v1(-19.9,1.1) -19.475,0.675 U301.5 ; U302.3 -5.4,-3 -3.4,-5 -3.4,-6.7 -3.6,-6.9 ; C304.1 -2.3,0 -2.15,-0.15 U302.10 ; U302.7 -1.2,-3.5 -0.45,-4.25 v1(-0.45,-4.5) -0.45,-5.25 -0.6,-5.4 ; C107.1@0.95,8.45 1.8,9.3 3.2,9.3 ; U104.3 3.45,9.05 3.2,9.3 ; R402.2 6,9.8 5.5,9.3 3.2,9.3 ; U401.1 8.575,-17.625 10.15,-16.05 ; U103.3 10.15,-16.05 ; C417.1@12.3,-22.25 C417.1 ; C106.1 12.25,-15.85 11.8,-16.3 10.4,-16.3 10.15,-16.05
  Top Layer w0.508: C412.1 -27,12.48 v1(-27,14) ; C413.1 -27.15,-7.72 BAT.2 -25.32,-7.25 D306.1 ; v1@-25.8,-14.5 v1(-25.75,-14.55) v1(-24.55,-14.55) ; R313.1 v1(-24.55,-14.55) ; C404.1 -21.701,18.299 pad.0 ; U303.2 -23.4,-15.7 v1(-24.55,-14.55) ; v1(-17.9,6.7) R303.1 ; v1(-16.5,6.7) R304.1 ; -15.25,-7.15 -15.2,-7.1 ; C310.1 -14.65,-13.4 -14.1,-12.85 D304.1 ; C302.1 -13,-0.9 v1(-12.35,-0.25) -12.35,0.65 v1(-12,1) ; v1(-12.2,-28) -12.2,-27.189 C414.1 ; C411.1 v1(-9,28.64) v1(-9,29.9) ; v1(-9.4,-7.2) C307.1 ; -3.6,-6.9 -3.65,-6.95 -4.15,-6.95 ; C403.1 v1(1.7,29) ; v1(0.8,6.8) C107.1 C107.1@0.95,8.45 ; C309.1 1.15,-5.4 -1.4,-5.4 -1.95,-5.95 R309.1 -4,-6.8 -4.15,-6.95 ; v1(5,-11) 5,-10.3 4.55,-9.85 ; R402.2 6.95,10.55 ; v1(6.8,-9) 6.35,-8.55 5.85,-8.55 ; v1(7.2,8.3) 7.2,10.3 6.95,10.55 ; v1(7.4,21) 6.975,21.425 U402.1 9.425,22.725 C419.1 ; C420.1 7.5,11.1 6.95,10.55 ; R401.2 8.25,-28.75 10.375,-26.625 ; U101.29 6.8,-7.6 5.85,-8.55 ; v1(9.4,-26.1) 9.925,-26.625 10.375,-26.625 ; C415.1 10.375,-26.625 ; C410.1 13.575,26.675 v1(16.1,29.2) ; C417.1@12.3,-22.25 C418.1 v1(10.8,-20.6) 11.2,-20.2 v1(12.5,-20.2) C417.1 ; v1(14.3,-18) 15.022,-17.278 C104.1 14.327,-16.628 13.55,-15.85 C106.1 12.9,-14.6 14.3,-13.2 U101.39 ; C105.1 15.25,3.25 15.9,2.6 v1(15.9,1.2) 15.1,0.4 U101.16 ; v1(16.45,24.55) 16.45,22.548 C402.1 ; C408.1 18.598,-20 pad.3 21.8,-18.2 D101.2 ; U101.6 21.2,-6.8 v1(22.1,-7.7) 24.3,-7.7 24.85,-7.15 C101.1 ; v1(20,-16) 20.35,-16.35 D101.2 ; PIC_IN_SITU.3 26.045,7.08 D103.1 ; D102.2 D101.2 ; v1(26.3,-14) 26.3,-11.86 C416.1 ; C409.1 27.125,9.775 v1(27.8,9.1) ; C401.1 27.75,-0.45 27.2,0.1 27.2,3.3 27.766,3.866 27.766,5.359 D103.1 ; -4.15,-6.95 R311.1 -4.15,-6.95 ; 4.55,-9.85 4.8,-9.6 C103.1 5.85,-8.55 ; 4.55,-9.85 D303.2 4.55,-9.85 ; D103.1 26.76,6.365 D103.1
  Top Layer w1.016: C312.1 C311.1 -17.6,-9.65 C317.2 -15.25,-7.15 ; C407.1 3.7,-30.65 v1(3.7,-32.6)
  MidLayer1 w2: 36,0 ccw(c0,0) 36,0
  MidLayer2 w2: 36,0 ccw(c0,0) 36,0
  Bottom Layer w0.508: v1(-15.8,14.3) U102.14 v1(-7,14.3) ; C406.1 -13.599,-26.601 v1(-12.2,-28) ; v1(7.2,8.3) U102.10 10.6,6.7 v1(9.9,6) ; C102.2 v1(16.45,24.55) 20,21 pad.2
  other v1: 3.7,-31.3 9.8,-27.2 -3,-24 -1,-24 -1,-22 9.131,-17.069 26.3,-12.7 -15,-8.5 -13,-8.5 -4,-8 -2.4,-8 23.8,-7.7 -14,-7 -1.8,0 -1.8,1.5 -27.9,1.8 -28.6,2.8 7.5,11.8 -7,19.7 -4.1,19.7 -0.8,19.7 14.8,27.9
LED1: R101.2 U101.2 | length 2.3
  Top Layer w0.508: U101.2 20.95,-10 R101.2
LED1_1: D401.2 U401.5 | length 36.4
  Top Layer w0.254: U401.5 5.975,-16.025 v1(6,-16)
  MidLayer2 w0.254: v1(6,-16) 18.6,-16 29.5,-5.1 29.5,-3.77 D401.2
LED1_2: D402.2 U401.6 | length 50
  Top Layer w0.254: v1(4,-16) 5.325,-17.325 U401.6
  MidLayer2 w0.254: v1(4,-16) 4.7,-15.3 6.5,-15.3 6.7,-15.5 18.3,-15.5 28.9,-4.9 28.9,7.4 30.086,8.586 D402.2
LED1_3: D403.2 U401.7 | length 63.7
  Top Layer w0.254: v1(3,-15) 3,-16.1 4.675,-17.775 U401.7
  MidLayer2 w0.254: v1(3,-15) 3.2,-14.8 6.8,-14.8 7,-15 17.9,-15 28.4,-4.5 28.4,8.2 28.9,8.7 28.9,11.3 23.499,16.701 D403.2
LED1_4: D404.2 U401.8 | length 99.5
  Top Layer w0.254: v1(2,-18) 3.6,-18 4.025,-18.425 U401.8
  MidLayer2 w0.254: v1(2,-18) 1.2,-18 0.4,-17.2 -0.4,-17.2 -2.1,-18.9 -15.2,-18.9 -23.3,-10.8 -23.3,1.7 -21.3,3.7 -21.3,13.8 -7.2,27.9 12.459,27.9 D404.2
LED1_5: D405.2 U401.9 | length 96.5
  Top Layer w0.254: v1(2.5,-23.7) 3.375,-22.825 U401.9
  MidLayer2 w0.254: D405.2 -2.33,28.4 -7.3,28.4 -20.527,15.173 -20.827,15.173 -23.8,12.2 -23.8,5.2 -22.7,4.1 -22.7,3 -23.8,1.9 -23.8,-11 -15.4,-19.4 -0.5,-19.4 -0.1,-19 1.6,-19 3,-20.4 3,-23.2 v1(2.5,-23.7)
LED1_6: D406.2 U401.10 | length 85.3
  Top Layer w0.254: v1(1.7,-23) 2.725,-21.975 U401.10
  MidLayer2 w0.254: D406.2 -11.127,25.273 -20.707,15.693 -21.007,15.693 -24.3,12.4 -24.3,5 -23.2,3.9 -23.2,3.3 -24.3,2.2 -24.3,-11.1 -15.5,-19.9 -0.2,-19.9 0.2,-19.5 1.3,-19.5 2.5,-20.7 2.5,-22.2 v1(1.7,-23)
LED1_7: D407.2 U401.11 | length 70.3
  Top Layer w0.254: v1(1.7,-21.8) 2.075,-21.425 U401.11
  MidLayer2 w0.254: D407.2 -21.702,21.898 -22.8,20.8 -22.8,14.6 -24.8,12.6 -24.8,-11.2 -15.6,-20.4 0.1,-20.4 0.4,-20.1 1.1,-20.1 1.7,-20.7 v1(1.7,-21.8)
LED1_8: D408.2 U401.12 | length 59.2
  Top Layer w0.254: v1(0.9,-21) 1.425,-20.475 U401.12
  MidLayer2 w0.254: D408.2 -28.2,12.559 -28.2,4.8 -29.4,3.6 -29.4,2 -27.4,0 -27.4,-9.3 -15.7,-21 v1(0.9,-21)
LED1_9: D409.2 U401.13 | length 53.6
  Top Layer w0.254: v1(-9,-24) -7,-26 1.3,-26 1.425,-25.875 U401.13
  Bottom Layer w0.254: D409.2 -30.8,0.07 -30.8,-3.6 -29.8,-4.6 -29.8,-9.7 -28.9,-10.6 -28.9,-11.4 -27.7,-12.6 -27.7,-14.1 -24.2,-17.6 -18.5,-17.6 -17.5,-18.6 -17.5,-21.4 -14.9,-24 v1(-9,-24)
LED1_10: D410.2 U401.14 | length 41.7
  Top Layer w0.254: D410.2 -29.073,-11.227 -27.7,-12.6 -27.7,-14.1 -24.1,-17.7 v1(-24.1,-18.9) ; v1(-16.35,-23.75) -15.5,-24.6 -9.6,-24.6 -7.7,-26.5 1.9,-26.5 2.075,-26.325 U401.14
  Bottom Layer w0.254: v1(-24.1,-18.9) -24.1,-19.5 -19.85,-23.75 v1(-16.35,-23.75)
LED1_11: D411.2 U401.15 | length 30.1
  Top Layer w0.254: D411.2 -23.097,-22.3 -20.5,-22.3 -17.7,-25.1 -9.8,-25.1 -7.9,-27 2.3,-27 2.725,-26.575 U401.15
LED1_12: D412.2 U401.16 | length 22.8
  Top Layer w0.254: D412.2 -13.573,-26.473 -12.7,-25.6 -10,-25.6 -8.1,-27.5 3,-27.5 3.375,-27.125 U401.16
LED1_13: D413.2 U401.17 | length 11.7
  Top Layer w0.254: D413.2 -1.5,-31.77 -1.5,-28.5 -1,-28 3.2,-28 4.025,-27.175 U401.17
LED1_14: D414.2 U401.18 | length 11.2
  Top Layer w0.254: U401.18 4.675,-28.975 5.4,-29.7 11.713,-29.7 D414.2
LED1_15: D415.2 U401.19 | length 22.2
  Top Layer w0.254: U401.19 5.325,-28.325 v1(6,-29)
  Bottom Layer w0.254: v1(6,-29) 10.4,-29 11,-28.4 12.4,-28.4 13.5,-27.3 14.7,-27.3 16.3,-25.7 16.9,-25.7 19.034,-23.566 D415.2
LED1_16: D416.2 U401.20 | length 32.5
  Top Layer w0.254: U401.20 5.975,-27.275 v1(6.3,-27.6)
  Bottom Layer w0.254: v1(6.3,-27.6) 6.6,-27.9 11.9,-27.9 13,-26.8 14.5,-26.8 16.1,-25.2 16.7,-25.2 19.3,-22.6 20.9,-22.6 23.7,-19.8 23.7,-18.3 28.827,-13.173 D416.2
LED2: R102.2 U101.3 | length 4.5
  Top Layer w0.508: U101.3 22.5,-9.2 23.2,-9.9 R102.2
LED2_1: D417.2 U402.5 | length 39.7
  Top Layer w0.254: U402.5 4.375,24.175 4.8,24.6 11.3,24.6 19.6,16.3 23.9,16.3 25.1,15.1 25.1,10.3 30.546,4.854 D417.2
LED2_2: D418.2 U402.6 | length 29.3
  Top Layer w0.254: U402.6 3.725,24.225 4.6,25.1 11.5,25.1 19.756,16.844 D418.2
LED2_3: D419.2 U402.7 | length 18.2
  Top Layer w0.254: U402.7 3.075,24.275 4.4,25.6 18.862,25.6 D419.2
LED2_4: D420.2 U402.8 | length 10.2
  Top Layer w0.254: U402.8 2.425,25.732 D420.2
LED2_5: D421.2 U402.9 | length 13.2
  Top Layer w0.254: D421.2 -5.154,29.654 -2.7,27.2 -0.1,27.2 1.775,25.325 U402.9
LED2_6: D422.2 U402.10 | length 22.3
  Top Layer w0.254: D422.2 -14.638,25.4 -10.3,25.4 -9,26.7 -0.3,26.7 1.125,25.275 U402.10
LED2_7: D423.2 U402.11 | length 33.9
  Top Layer w0.254: D423.2 -23.238,16.4 -18.7,16.4 -9,26.1 -0.6,26.1 0.475,25.025 U402.11
LED2_8: D424.2 U402.12 | length 41.9
  Top Layer w0.254: D424.2@-30.907,7.4 -29.4,7.4 -25.8,11 -25.8,13.1 -23,15.9 -18.5,15.9 -8.9,25.5 -0.9,25.5 -0.175,24.775 U402.12
  Top Layer w0.508: D424.2 D424.2@-30.907,7.4
LED2_9: D425.2 U402.13 | length 50.6
  Top Layer w0.254: v1(-29.4,5.3) -29.4,6.7 -25.2,10.9 -25.2,12.8 -22.7,15.3 -0.7,15.3 -0.175,15.825 U402.13
  Bottom Layer w0.254: D425.2 -31.548,-3.752 -33.2,-2.1 -33.2,2.6 -32.45,3.35 -30.75,3.35 -29.4,4.7 v1(-29.4,5.3)
LED2_10: D426.2 U402.14 | length 66
  Top Layer w0.254: v1(-18.5,14.3) -17,14.3 -16.1,13.4 -2,13.4 0.475,15.875 U402.14
  Bottom Layer w0.254: D426.2 -28.256,-16.444 -30.4,-14.3 -30.4,-12.8 -31.4,-11.8 -31.4,-9.1 -32.8,-7.7 -32.8,-3.2 -33.625,-2.375 -33.625,2.775 -32.8,3.6 -32.8,5.5 -32.2,6.1 -32.2,7.9 -31.4,8.7 -27.3,8.7 -21.7,14.3 v1(-18.5,14.3)
LED2_11: D427.2 U402.15 | length 83.4
  Top Layer w0.254: v1(-16.7,12.7) -2.1,12.7 1.125,15.925 U402.15
  Bottom Layer w0.254: D427.2 -21.306,-25.994 -27.2,-20.1 -27.2,-18.3 -30.869,-14.631 -30.869,-13.037 -31.9,-12.006 -31.9,-9.2 -33.3,-7.8 -33.3,-3.5 -34.1,-2.7 -34.1,3 -33.4,3.7 -33.4,5.7 -32.7,6.4 -32.7,8.2 -31.6,9.3 -27.4,9.3 -21.5,15.2 -18.2,15.2 -17.7,14.7 -17.7,13.7 v1(-16.7,12.7)
LED2_12: D428.2 U402.16 | length 102.4
  Top Layer w0.254: v1(-15,11.9) -2.3,11.9 1.775,15.975 U402.16
  Bottom Layer w0.254: v1(-15,11.9) -15,12.2 -17.1,14.3 -17.1,15 -17.8,15.7 -25,15.7 -25.5,15.2 -29.7,15.2 -31.2,13.7 -31.2,10.5 -33.3,8.4 -33.3,6.8 -33.9,6.2 -33.9,3.8 -34.55,3.15 -34.55,-2.85 -33.8,-3.6 -33.8,-7.9 -32.4,-9.3 -32.4,-12.225 -31.275,-13.35 -31.275,-14.925 -27.8,-18.4 -27.8,-20.2 -21.3,-26.7 -20.1,-26.7 -17.9,-28.9 -15.7,-28.9 -12.6,-32 -8.493,-32 D428.2
LED2_13: D429.2 U402.17 | length 55.3
  Top Layer w0.254: v1(0.2,13.2) 0.5,13.5 0.5,14 2.425,15.925 U402.17
  MidLayer2 w0.254: v1(0.2,13.2) -2.8,10.2 -3.3,10.2 -3.7,9.8 -3.7,6.6 1.3,1.6 1.3,-15.3 4.5,-18.5 4.5,-30.193 D429.2
LED2_14: D430.2 U402.18 | length 56.8
  Top Layer w0.254: v1(-2.703,9.297) -0.7,11.3 -0.2,11.3 3.075,14.575 U402.18
  MidLayer2 w0.254: v1(-2.703,9.297) -2.703,6.703 2,2 2,-15.2 10.5,-23.7 13.538,-23.7 D430.2
LED2_15: D431.2 U402.19 | length 61.1
  Top Layer w0.254: v1(2.4,12.3) 3.725,13.625 U402.19 ; v1(25.5,-4.2) 26.6,-5.3 26.6,-7.9 25,-9.5 25,-17.862 D431.2
  MidLayer2 w0.254: v1(2.4,12.3) 3.6,13.5 17.9,13.5 20.5,10.9 24.2,10.9 26.2,8.9 26.2,-3.5 v1(25.5,-4.2)
LED2_16: D432.2 U402.20 | length 47.1
  Top Layer w0.254: v1(3.8,12.3) 4.375,12.875 U402.20
  MidLayer2 w0.254: v1(3.8,12.3) 6.5,12.3 6.8,12.6 17.7,12.6 21.9,8.4 24,8.4 25.3,7.1 v1(25.3,-3.1)
  Bottom Layer w0.254: v1(25.3,-3.1) 26.1,-3.1 30.346,-7.346 31.146,-7.346 D432.2@30.9,-7.1
LED_POWER: C313.2 C314.2 C315.2 C316.2 C401.2 C402.2 C403.2 C404.2 C405.2 C406.2 C407.2 C408.2 C409.2 C410.2 C411.2 C412.2 C413.2 C414.2 C415.2 C416.2 D401.1 D402.1 D403.1 D404.1 D405.1 D406.1 D407.1 D408.1 D409.1 D410.1 D411.1 D412.1 D413.1 D414.1 D415.1 D416.1 D417.1 D418.1 D419.1 D420.1 D421.1 D422.1 D423.1 D424.1 D425.1 D426.1 D427.1 D428.1 D429.1 D430.1 D431.1 D432.1 L303.2 PT15.1 R314.2 | length 412.7
  Top Layer w0.508: -36,-1 -35.73,-1.27 ; -36,5 -35.954,4.954 ; -35,-8 -34.746,-7.746 ; -34,11 -33.973,11.027 ; -33,-14 -32.573,-13.573 ; -32,16 -31.256,16.744 ; -31,-18 -30.444,-18.556 ; -25,-26 -24.204,-26 ; D407.1@-23.802,21.802 D407.1 ; -21,28.238 -21,29 ; -19,-30 -19,-29.662 ; -14,33 -13.473,32.473 ; -12,-34 -11.227,-33.227 ; -8,35 -7.646,34.646 ; -5.054,-35.946 -5,-36 ; -1.27,35.73 -1,36 ; 1,-36 1.27,-35.73 ; 5,36 5.054,35.946 ; 8,-35 8.246,-34.754 ; 11,34 11.227,33.773 ; D414.1@14.073,-29.073 D414.1 ; D419.1 D419.1@17.206,27.206 ; D430.1@19.056,-26.056 D430.1 ; D403.1 D403.1@21.703,23.703 ; D415.1 D415.1@23.77,-21.77 ; 29,21.662 29,22 ; 31.744,-16.744 32,-17 ; 32.273,13.273 33,14 ; 33.827,-10.827 34,-11 ; 34.654,7.346 35,7 ; 35.73,1.27 36,1 ; 35.854,-4.854 36,-5
  Top Layer w1.016: -35.954,4.954 D424.1 ; -35.73,-1.27 D409.1 -29.02,-1.27 C405.2 ; -34.746,-7.746 D425.1 -30.598,-8.2 C413.2 ; -33.973,11.027 D408.1 -29.494,10.535 C412.2 ; -32.573,-13.573 D410.1 ; -31.256,16.744 D423.1 -28,17.638 -28,19.3 -26.6,20.7 -25,20.7 C404.2 ; -30.444,-18.556 D426.1 ; -26,24 D407.1@-23.802,21.802 ; -24.204,-26 D411.1 ; -21,28.238 D422.1 ; -19,-29.662 D427.1 ; -13.473,32.473 D406.1 -13.473,28.463 C411.2 ; -11.227,-33.227 D412.1 -10.115,-28.874 C414.2 ; D421.1 -7.646,34.646 ; -5.054,-35.946 D428.1 ; -1.27,35.73 D405.1 -1.25,31.98 C403.2 ; C407.2 1.27,-29.92 D413.1 1.27,-35.73 ; D420.1 5.054,35.946 ; 8.246,-34.754 D429.1 ; C410.2 10.215,28.974 D404.1 11.227,33.773 ; C415.2 14.073,-27.163 D414.1 ; D414.1@14.073,-29.073 17,-32 ; D419.1@17.206,27.206 20,30 ; C402.2 21.405,23.201 D403.1 ; C408.2 18.401,-25.04 D430.1 ; D430.1@19.056,-26.056 22,-29 ; D403.1@21.703,23.703 24,26 ; D415.1@23.77,-21.77 26,-24 ; D418.1 29,21.662 ; C409.2 27.763,13.273 D402.1 32.273,13.273 ; C416.2 29.174,-9.915 D416.1 33.827,-10.827 ; D431.1 31.744,-16.744 ; C401.2 31.98,1.25 D401.1 35.73,1.27 ; D417.1 34.654,7.346 ; D432.1 35.854,-4.854
  Top Layer w2: 36,0 ccw(c0,0) 36,0
  Bottom Layer w1.016: D427.1 -16.744,-26.442 C406.2
  other v1: 0,-18 0,-16 0,-14
NetBAT_1: BAT.1 P301.1
NetC101_2: C101.2 U101.7 | length 3.1
  Top Layer w0.508: U101.7 22.85,-6 C101.2
NetC303_1: C303.1 LED_VISION.2 R303.2 R304.2 U301.3 | length 17.5
  Top Layer w0.254: U301.3 -18.825,4.975 -18.4,5.4 -15.8,5.4 -14.7,6.5 -14.7,9.5 -15.15,9.95 R304.2
  Top Layer w1.016: C303.1 -19.96,12.61 LED_VISION.2 -18.71,9.95 R304.2
NetC303_2: C303.2 L301.2 LED_VISION.1 | length 2.2
  Top Layer w0.508: LED_VISION.1 LED_VISION.1@-22.45,11.25
  Top Layer w1.016: LED_VISION.1@-22.45,11.25 C303.2
NetC306_2: C306.2 R305.1 U302.8 | length 11.8
  Top Layer w0.254: v1(-3.7,-2.8) -3.5,-3 U302.8
  Top Layer w0.508: R305.1 C306.2 -5.05,3.35 v1(-5,3.4)
  Bottom Layer w0.254: v1(-5,3.4) -3.7,2.1 v1(-3.7,-2.8)
NetC307_2: C307.2 U302.2 | length 4.2
  Top Layer w0.254: C307.2 -9.4,-2.9 -9,-2.5 U302.2
NetC308_1: C308.1 R307.1 R309.2 U302.5 | length 16.3
  Top Layer w0.254: U302.5 -5.4,-4 v1(-4.9,-4.5) ; v1(-1.3,-8.8) -0.15,-8.8 -0.15,-6.9 R309.2
  Top Layer w0.508: R307.1 -0.15,-6.9 R309.2 C308.1
  MidLayer2 w0.254: v1(-4.9,-4.5) -3.3,-4.5 -1.3,-6.5 v1(-1.3,-8.8)
NetC313_1: C313.1 R312.1 R313.2 U303.1 | length 21.5
  Top Layer w0.254: U303.1 -22.475,-14.125 -22.85,-13.75 R313.2 R312.1 -22.85,-11.05 -22.5,-10.7 v1(-21.3,-10.7) ; v1(-7.3,-10.7) -6.9,-11.1 C313.1
  MidLayer2 w0.254: v1(-21.3,-10.7) v1(-7.3,-10.7)
NetD101_1: D101.1 R101.1 | length 2.1
  Top Layer w0.508: D101.1 R101.1
NetD102_1: D102.1 R102.1 | length 2.1
  Top Layer w0.508: D102.1 R102.1
NetD302_2: D302.2 L303.1 Q302.5 Q302.6 Q302.7 Q302.8 R312.2 | length 18.1
  Top Layer w0.254: R312.2 -24.55,-10.55 -24.2,-10.2 -22.8,-10.2 v1(-22.1,-9.5) v1@-22.35,-9.5
  MidLayer2 w0.254: v1(-22.1,-9.5) -22.1,-11.1 -19.9,-13.3 -16.4,-13.3 v1(-15.9,-13.8)
  Bottom Layer w0.254: v1(-15.9,-13.8) -15.9,-15.7 -15.4,-16.2 L303.1
  other v1: -10,-18 -10,-16 -10,-14 -10,-12
NetD303_1: D303.1 R314.1 | length 1.9
  Top Layer w0.508: R314.1 2.3,-11.2 2.65,-11.55 D303.1
NetD305_1: D305.1 R315.1 | length 2.1
  Top Layer w0.508: D305.1 R315.1
NetL302_1: L302.1 U302.9
NetQ301_4: Q301.4 U301.6 | length 5.9
  Top Layer w0.254: Q301.4 -21.025,1.075 -20.3,1.8 -19.5,1.8 -18.825,1.125 U301.6
NetQ302_4: Q302.4 U303.5 | length 4.3
  Top Layer w0.254: U303.5 -19.25,-14.75 -18.9,-15.1 -18.9,-16.1 -18.525,-16.475 Q302.4
NetR301_2: R301.2 U301.4 | length 2.4
  Top Layer w0.254: U301.4 R301.2@-19.475,6.025
  Top Layer w0.508: R301.2 R301.2@-19.475,6.025
NetR302_1: R302.1 U301.8 | length 6.2
  Top Layer w0.254: U301.8 -17.525,0.775 -16.7,1.6 -14.1,1.6 -13.85,1.35 R302.1
NetR306_1: R306.1 U302.4 | length 1.9
  Top Layer w0.254: R306.1 -7.75,-3.5 U302.4
NetR307_2: R307.2 R308.1 | length 1.5
  Top Layer w0.508: R307.2 R308.1
NetR310_1: R310.1 R311.2 U303.3 | length 24.2
  Top Layer w0.508: v1(-25,-15.7) -24.05,-16.65 U303.3 ; v1(-9.3,-8.7) -9.25,-8.65 R310.1 R311.2
  Bottom Layer w0.508: v1(-25,-15.7) -24.2,-15.7 -19.2,-10.7 -11.3,-10.7 v1(-9.3,-8.7)
NetR401_1: R401.1 U401.23 | length 2.1
  Top Layer w0.254: R401.1 7.6,-26.4 7.925,-26.075 U401.23
NetR402_1: R402.1 U402.23 | length 5.1
  Top Layer w0.254: R402.1 6.512,12.762 6.512,15.788 6.325,15.975 U402.23
PIC_IN_SITU_PGC: PIC_IN_SITU.5 U101.22 | length 20.9
  Top Layer w0.254: U101.22 10.3,3.1 19.36,12.16 PIC_IN_SITU.5
PIC_IN_SITU_PGD: PIC_IN_SITU.4 U101.21 | length 19
  Top Layer w0.254: U101.21 11.1,3.1 17.62,9.62 PIC_IN_SITU.4
PIC_RESET: D103.3 PIC_IN_SITU.1 R103.1 U101.18 | length 20.8
  Top Layer w0.254: U101.18 13.5,0.1 13.1,0.5 13.1,3.9 13.8,4.6 17.2,4.6 19.75,2.05 R103.1
  Top Layer w0.508: R103.1 23.05,2.05 PIC_IN_SITU.1 25,2 26,3 D103.3
PIC_TO_DRV1: PT5.1 U101.26 U401.2 | length 19.8
  Top Layer w0.254: U401.2 v1@7.925,-16.825 ; U101.26 10.2,-5.2 v1(11,-6)
  Top Layer w0.508: v1(7.9,-16.8) v1@7.925,-16.825
  Bottom Layer w0.254: v1(7.9,-16.8) 7.9,-16.1 9.755,-14.245 ; PT5.1 8.8,-15.2 9.755,-14.245 ; v1(11,-6) 11.6,-6.6 11.6,-12.4 9.755,-14.245
PWM_RAIL1: PT8.1 U101.37 U103.1 | length 5.5
  Top Layer w0.254: U103.1 11.45,-14.8 12.7,-13.55 U101.37
  Bottom Layer w0.254: PT8.1 11.775,-14.475 v1(12,-14.25)
PWM_RAIL2: PT9.1 U101.38 U104.2 | length 28
  Top Layer w0.254: U104.2 v1(2.8,7.15) 5.5,4.45 v1(5.5,1.6) ; v1(13,-8) 13.5,-8.5 U101.38
  Bottom Layer w0.254: v1(2.8,7.15) 3.5,6.45 PT9.1 ; v1(5.5,1.6) 7.7,1.6 10.9,-1.6 10.9,-4.9 13,-7 v1(13,-8)
SCLK: PT4.1 U101.25 U401.3 U402.3 | length 51
  Top Layer w0.25: 7,6.2 8.4,7.6
  Top Layer w0.254: U402.3 5.675,21.025 8.4,18.3 8.4,7.6 ; v1(6.4,-10.4) 7,-11 7,-17.4 7.275,-17.675 U401.3 ; 7,6.2 7,-4 7.4,-4.4 U101.25
  Bottom Layer w0.254: PT4.1 6.3,-10.5 v1(6.4,-10.4) 5.8,-9.8 5.8,-2.5 v1(7,-1.3)
UART_LED: PT7.1 U101.36 U103.2 U104.1 | length 32.7
  Top Layer w0.254: U104.1 2.15,6.35 v1(4.5,4) ; v1(10.422,-8.422) 11.9,-9.9 U101.36 ; U103.2 10.8,-14.25 v1(10.975,-14.075) 11.9,-13.15 U101.36 ; 11.9,-13.125 U101.36
  Bottom Layer w0.254: v1(4.5,4) 4.5,1.575 5.25,0.825 7.775,0.825 9.6,-1 9.6,-7.6 v1(10.422,-8.422) ; PT7.1 10.15,-14.9 v1(10.975,-14.075)
VBAT: C301.2 C302.2 C304.2 C310.2 C311.2 C312.2 C317.1 D304.2 D306.3 P301.2 PT16.1 Q301.1 Q301.2 Q301.3 Q302.1 Q302.2 Q302.3 R302.2 R305.2 R315.2 U301.7 U302.1 U302.6 U303.4 | length 30
  Top Layer w0.254: C304.2 -5.25,-1.05 -4.5,-1.8 -4.5,-3.1 -3.6,-4 U302.6
  Top Layer w0.508: D306.3 -20.6,-8.2 ; U303.4 -19.25,-16.65 -17.6,-18.3 C310.2 -16.55,-17.55 -15.8,-16.8 -15.8,-15.6 -16.225,-15.175 Q302.2 ; P301.2 -19.75,-7.35 -20.6,-8.2 ; C312.2 -19.45,-9.35 -20.6,-8.2 ; v1(-10.45,4.325) -10.45,3.7 R305.2
  Bottom Layer w0.508: v1(-10.45,4.325) PT16.1
VISION_ENABLE: PT1.1 U101.34 U301.2 | length 42.9
  Top Layer w0.254: U301.2 -18.175,4.725 -18,4.9 -16.2,4.9 -16,4.7 v1(-16,4) ; v1(8,-14) 10,-14 10.3,-13.7 U101.34
  Bottom Layer w0.254: v1(-16,4) -13.8,4 -7.2,-2.6 -7.2,-4.1 -4.5,-6.8 -0.6,-6.8 6.6,-14 ; PT1.1 6.1,-13.5 6.6,-14 ; v1(8,-14) 6.6,-14
VLX_LED: D301.2 L301.1 Q301.5 Q301.6 Q301.7 Q301.8 U301.1 | length 10.4
  Top Layer w0.254: v1(-24,3.6) -24,4.2 -23.5,4.2 Q301.8 ; v1(-18,2) -17.525,2.475 U301.1
  Bottom Layer w0.254: v1(-24,3.6) -19.6,3.6 v1(-18,2)
XBEE_C\T\S\: U101.14 U102.12 | length 37.5
  Top Layer w0.254: v1(13.2,-4.2) 15.2,-4.2 16.7,-2.7 U101.14
  Bottom Layer w0.254: U102.12 -1.3,10.3 1.525,7.475 1.525,6.475 3,5 5.2,5 12.3,-2.1 12.3,-3.3 v1(13.2,-4.2)
XBEE_D\T\R\: U101.11 U102.9 | length 18.8
  Top Layer w0.508: U101.11 20,-2.7 v1(20,-1.3)
  Bottom Layer w0.508: U102.9 13.6,10.3 14.3,9.6 14.3,4.4 v1(20,-1.3)
XBEE_DIN: PT10.1 U101.8 U102.2 | length 41.7
  Top Layer w0.508: U101.8 21.5,-5.2 24.4,-2.3 24.4,-1.6 v1(24.4,-1)
  Bottom Layer w0.508: U102.2 13.6,24.3 17.3,20.6 17.3,5.6 22.4,0.5 22.9,0.5 v1(24.4,-1) 24.6,-1 PT10.1
XBEE_DOUT: PT11.1 U101.9 U102.3 | length 37.7
  Top Layer w0.508: U101.9 21.2,-4.4 23,-2.6 v1(23,-1)
  Bottom Layer w0.508: U102.3 14,22.3 16.3,20 16.3,5.4 22,-0.3 22.3,-0.3 v1(23,-1) 23.475,-1.475 PT11.1
XBEE_ON/SLEEP: U101.12 U102.13 | length 39.6
  Top Layer w0.254: v1(15.3,-5) 18.3,-2 U101.12
  Bottom Layer w0.254: U102.13 -2.4,12.3 1.55,8.35 2.75,8.35 12.9,-1.8 12.9,-2.9 13.5,-3.5 13.8,-3.5 v1(15.3,-5)
XBEE_R\E\S\E\T\: U101.10 U102.5 | length 31.8
  Top Layer w0.508: 20.8,-3.6 U101.10 20.9,-3.6 22,-2.5 v1(22,-2)
  Bottom Layer w0.508: U102.5 14.6,18.3 15.2,17.7 15.2,5.1 21.9,-1.6 ; 21.9,-1.6 22,-1.7 v1(22,-2) 21.9,-1.9 21.9,-1.6
XBEE_R\T\S\: U101.15 U102.16 | length 37.6
  Top Layer w0.254: v1(15.3,-3) 15.9,-2.4 U101.15
  Bottom Layer w0.254: U102.16 -6,18.3 v1(15.3,-3)
pads on no net: D103.2 D306.2 PIC_IN_SITU.6 U101.1 U101.4 U101.5 U101.13 U101.19 U101.20 U101.23 U101.24 U101.30 U101.31 U101.32 U101.33 U101.35 U102.4 U102.6 U102.7 U102.8 U102.11 U102.15 U102.17 U102.18 U102.19 U102.20
copper on no net: | length 305.8
  Top Layer w0.254: -7.2,21.2 -7.2,22.9 ; -5.7,21.2 -5.7,22.9 ; -4.3,21.2 -4.3,22.9 ; -8.6,21.2 -2.9,21.2 -2.9,22.9 -8.6,22.9 -8.6,21.2
  MidLayer1 w0.254: -7.2,21.2 -7.2,22.9 ; -5.7,21.2 -5.7,22.9 ; -4.3,21.2 -4.3,22.9 ; -8.6,21.2 -2.9,21.2 -2.9,22.9 -8.6,22.9 -8.6,21.2
  MidLayer2 w0.254: -7.2,21.2 -7.2,22.9 ; -5.7,21.2 -5.7,22.9 ; -4.3,21.2 -4.3,22.9 ; -8.6,21.2 -8.6,22.9 -2.9,22.9 -2.9,21.2 -8.6,21.2
  Bottom Layer w0.254: -7.2,21.2 -7.2,22.9 ; -7.2,21.2 -5.7,21.2 ; -7.2,21.2 -8.6,21.2 -8.6,22.9 -7.2,22.9 ; -7.2,22.9 -5.7,22.9 ; -5.7,21.2 -5.7,22.9 ; -5.7,21.2 -4.3,21.2 ; -5.7,22.9 -4.3,22.9 ; -4.3,21.2 -2.902,21.2 -2.9,21.202 -2.9,22.9 -4.3,22.9 ; -4.3,21.2 -4.3,22.9
  Bottom Layer w2: 36,0 ccw(c0,0) 36,0

## Other copper
Top Layer:
  region net VBAT: -7,-2 -7.5,-1.5 -8.7,-1.5 -8.5,-0.5 -5.25,-0.5 -5.25,-1.75 -5.5,-2
  region net GND: -7.1,-6.4 -1.4,-6.4 -1.4,-8 -2,-8.6 -4.4,-8.6 -5.5,-7.5 -7,-7.5 -7.1,-7.4
  region net GND: -0.8,-20.2 0,-21 0,-24 -1,-25 -6,-25 -8,-23 -8,-21.4 -6.8,-20.2
  region net GND: -7,-24 -8,-23 -8,-19 -7,-18 -7,-12.3 -6.7,-12 -5.3,-12 -5,-12.3 -5,-19 -3.8,-20.2 -3.8,-23.8 -4,-24
  region net GND: -16,-12.5 -15.5,-13 -13,-13 -10.3,-10.3 -10.3,-8.7 -11.4,-8.7 -12.1,-8 -12.1,-7 -13.1,-6 -15,-6 -16,-7
  region net NetD302_2: -13.3,-17 -13.3,-23.7 -13,-24 -10.5,-24 -10,-23.5 -10,-19.3 -9,-18.3 -10.3,-17
  region net +3.3V: 2.6,-0.4 3,0 5,0 5.5,-0.5 5.5,-6.7 5.35,-6.85 3.3,-6.85 3.3,-5.2 2.6,-4.5
  region net NetL302_1: -2.9,-2.4 -1.3,-2.4 -0.1,-1.2 1,-1.2 1.3,-1.5 1.3,-3.6 1.1,-3.8 -0.1,-3.8 -1.3,-2.6 -2.7,-2.6
  region net VBAT: -8,2.3 -8,1.3 -7.5,0.8 -4.6,0.8 -4.6,-0.8 -7.9,-0.8 -10.3,-3.2 -10.7,-2.8 -13.6,-2.8 -14.3,-2.1 -13,-2.1 -10,0.9 -10,1.8 -9.5,2.3
  region net GND: -20,8.3 -18.9,8.3 -18.4,8.8 -16,8.8 -16,7.7 -18.5,7.7 -19,7.2 -20,7.2
  region net LED_POWER: -4.4,-19 -4,-19.4 -0.4,-19.4 0.8,-18.2 0.8,-12.2 0.5,-11.9 0.5,-10.7 -0.9,-10.7 -1.3,-10.3 -4.2,-10.3 -4.4,-10.5
  region net NetD302_2: -13.3,-14 -12.5,-13.2 -11.9,-13.2 -11,-12.3 -11,-11.7 -10.5,-11.2 -9.4,-11.2 -9,-11.6 -9,-18.3 -9.5,-18.8 -11.5,-18.8 -13.3,-17
  region net NetC303_2: -23.4,7.6 -23.8,8 -23.8,11.6 -22.9,12.5 -21.9,12.5 -21.4,12 -21.4,10.4 -20.7,9.7 -20.7,8 -21.1,7.6
  region net GND: -29.5,-0.1 -28.1,-0.1 -27.7,-0.5 -27.7,-1.1 -26.4,-1.1 -26.4,0.4 -25.7,1.1 -25.1,1.1 -25,1.2 -25,3.6 -25.1,3.7 -28.8,3.7 -29.5,3
  region net VLX_LED: -27,5 -27.4,5.4 -27.4,8 -27,8.4 -24.7,8.4 -24.3,8 -24.3,7.6 -23.7,7 -20.9,7 -20.4,6.5 -20.4,3.5 -23.4,3.5 -24.9,5
  region net VBAT: -26,0.3 -25.7,0.6 -24,0.6 -23,1.6 -22,1.6 -21.5,1.1 -21.5,-1.4 -20.6,-2.3 -19.4,-2.3 -19.4,-5.3 -19.8,-5.7 -21,-5.7 -21.6,-5.1 -21.6,-2.3 -22.1,-1.8 -25.6,-1.8 -26,-1.4
  region net VBAT: -20.7,-2.3 -19.4,-2.3 -18.4,-1.3 -18.4,-0.8 -18.3,-0.7 -18,-0.7 -17.9,-0.8 -17.9,-1.9 -17.6,-2.2 -16.6,-2.2 -16.1,-1.7 -16.1,1 -15.9,1.2 -15.2,1.2 -15,1 -15,-1.4 -13.6,-2.8 -10.7,-2.8 -10.3,-3.2 -10.3,-4.3 -10.5,-4.5 -11.8,-4.5 -12.1,-4.8 -12.1,-5.1 -12.5,-5.5 -17.8,-5.5 -18,-5.7 -20.7,-5.7
  region net NetBAT_1: -26.9,-3.1 -26.1,-2.3 -22.7,-2.3 -22.3,-2.7 -22.3,-5.3 -22.7,-5.7 -24.6,-5.7 -25,-5.3 -26.4,-5.3 -26.9,-4.8
  region net GND: -4,-0.8 -3.1,-1.7 -1.7,-1.7 -1,-1 -1,2 -2,3 -3.7,3 -4,2.7
  region net VBAT: -18.3,-14.6 -20.282,-12.618 -20.282,-7.882 -19.75,-7.35 -19.75,-7 -19.6,-7 -18.8,-7.8 -18.8,-12.7 -17.4,-14.1 -17.1,-14.1 -16.7,-14.5 -16.7,-15.9 -17.7,-15.9 -17.7,-14.6
  text "1" at -8.1,21.6 h1.52
MidLayer1:
  text "2" at -6.8,21.6 h1.52
MidLayer2:
  region net +3.3V: 7,-3.3 4.7,-3.3 4.2,-3.8 4.2,-5.9 4.8,-6.5 8.387,-6.5 10.943,-3.943 9.8,-2.8 7.6,-2.8
  text "3" at -5.3,21.6 h1.52
Bottom Layer:
  region net LED_POWER: -4,-19.4 -0.4,-19.4 0.8,-18.2 0.8,-13.4 0.1,-12.7 -3.8,-12.7 -4.4,-13.3 -4.4,-19
  region net NetD302_2: -14.8,-13.4 -12.7,-13.4 -12.5,-13.2 -11.9,-13.2 -11,-12.3 -11,-11.7 -10.5,-11.2 -9.4,-11.2 -9,-11.6 -9,-18.3 -9.7,-19 -14.8,-19
  region net LED_POWER: -2.2,-19.4 -3.9,-21.1 -3.9,-27 -1.2,-29.7 1.7,-29.7 3,-31 3,-32 2,-33 0.5,-33 0,-32.5 0,-31.2 -0.6,-30.6 -2.9,-30.6 -3.7,-31.4 -3.7,-32 -4.5,-32.8 -5.6,-32.8 -6.4,-32 -6.4,-15.3 -3.8,-12.7 -2.2,-14.3
  text "4" at -3.9,21.6 h1.52

## Silkscreen, mask and mechanical layers (free items; w line width, h text height)
Top Overlay:
  lines w0.254: -0.13,0.13 0.13,0.13

## Text inside footprints (layer, text, board x,y; h text height)
BAT: Bottom Overlay "+" at -25.423,-1.63 h1.15 r90
C317: Bottom Overlay "+" at -16.85,0.075 h1.5 r90